# Altium PCB first_test.PcbDoc (part 1 of 5)
Units mil, origin at the board's own origin, x right, y up, seen from the top; angles counter-clockwise.
Board outline 3440.59 x 3087.6 mil, 4 copper layers (Top Layer, GND, VCC, Bottom Layer); 175 components, 91 nets, 2807 pads, 1128 vias.
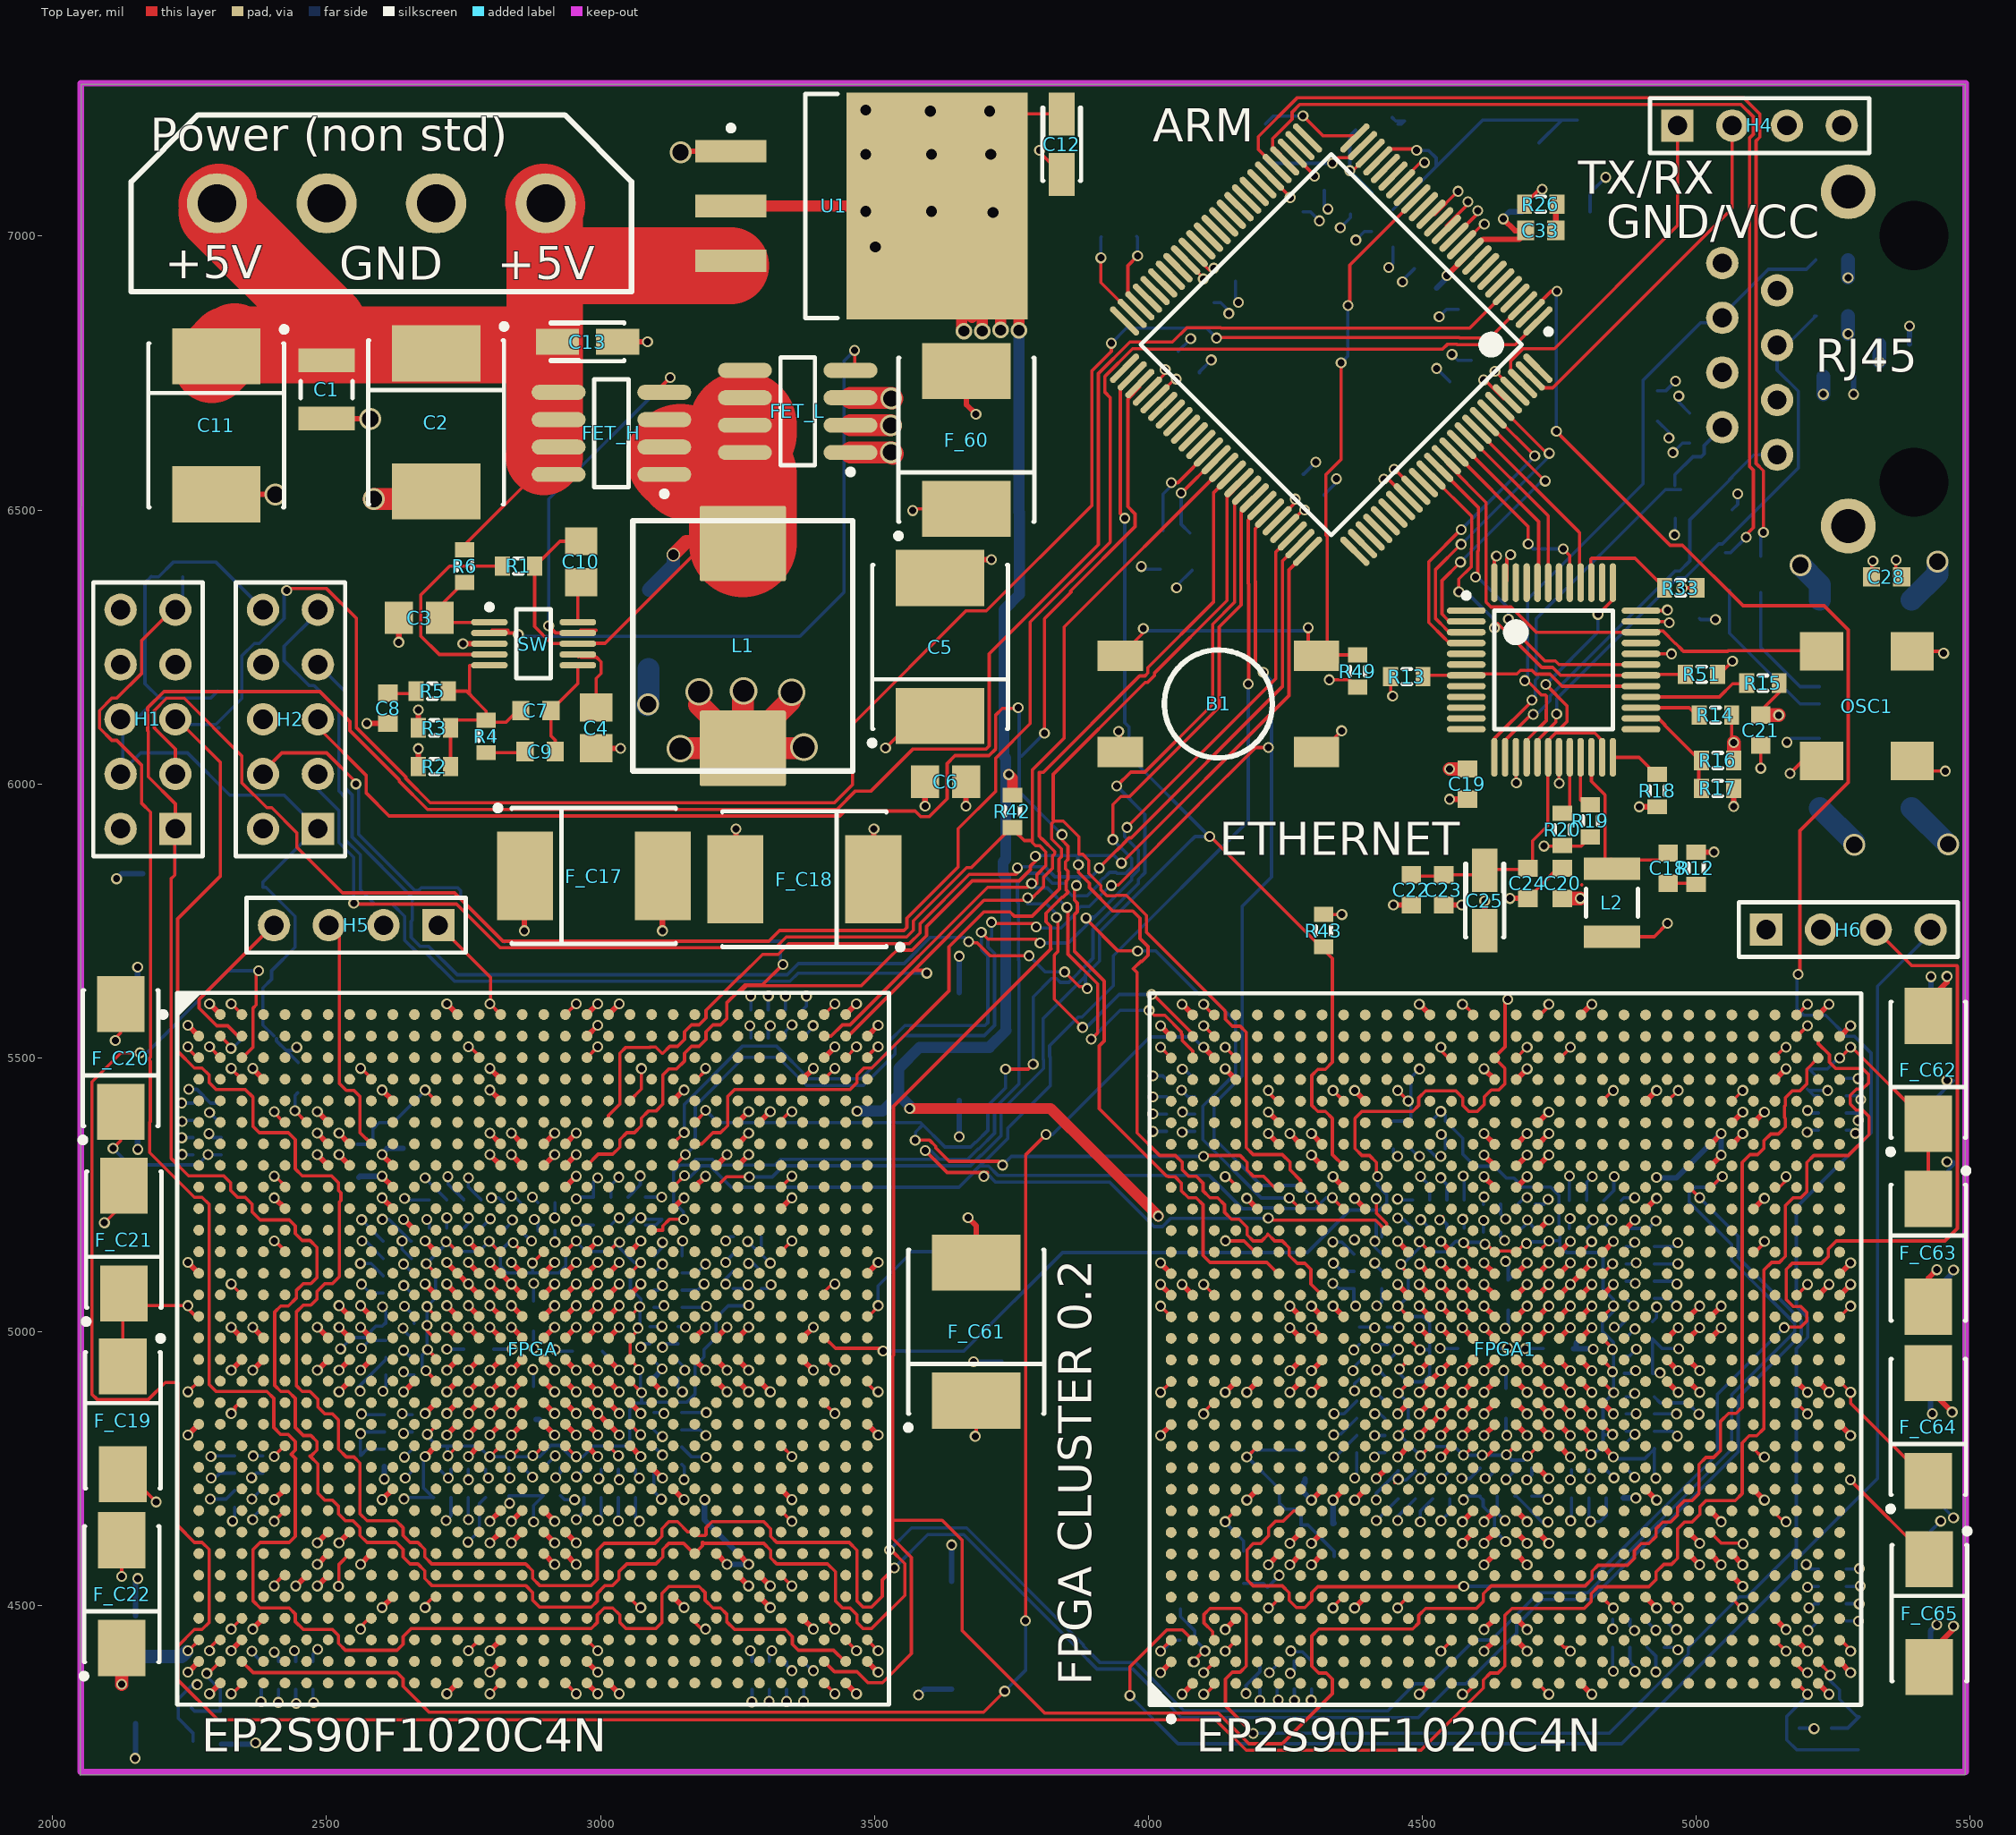
[diagram p0: Top Layer view]
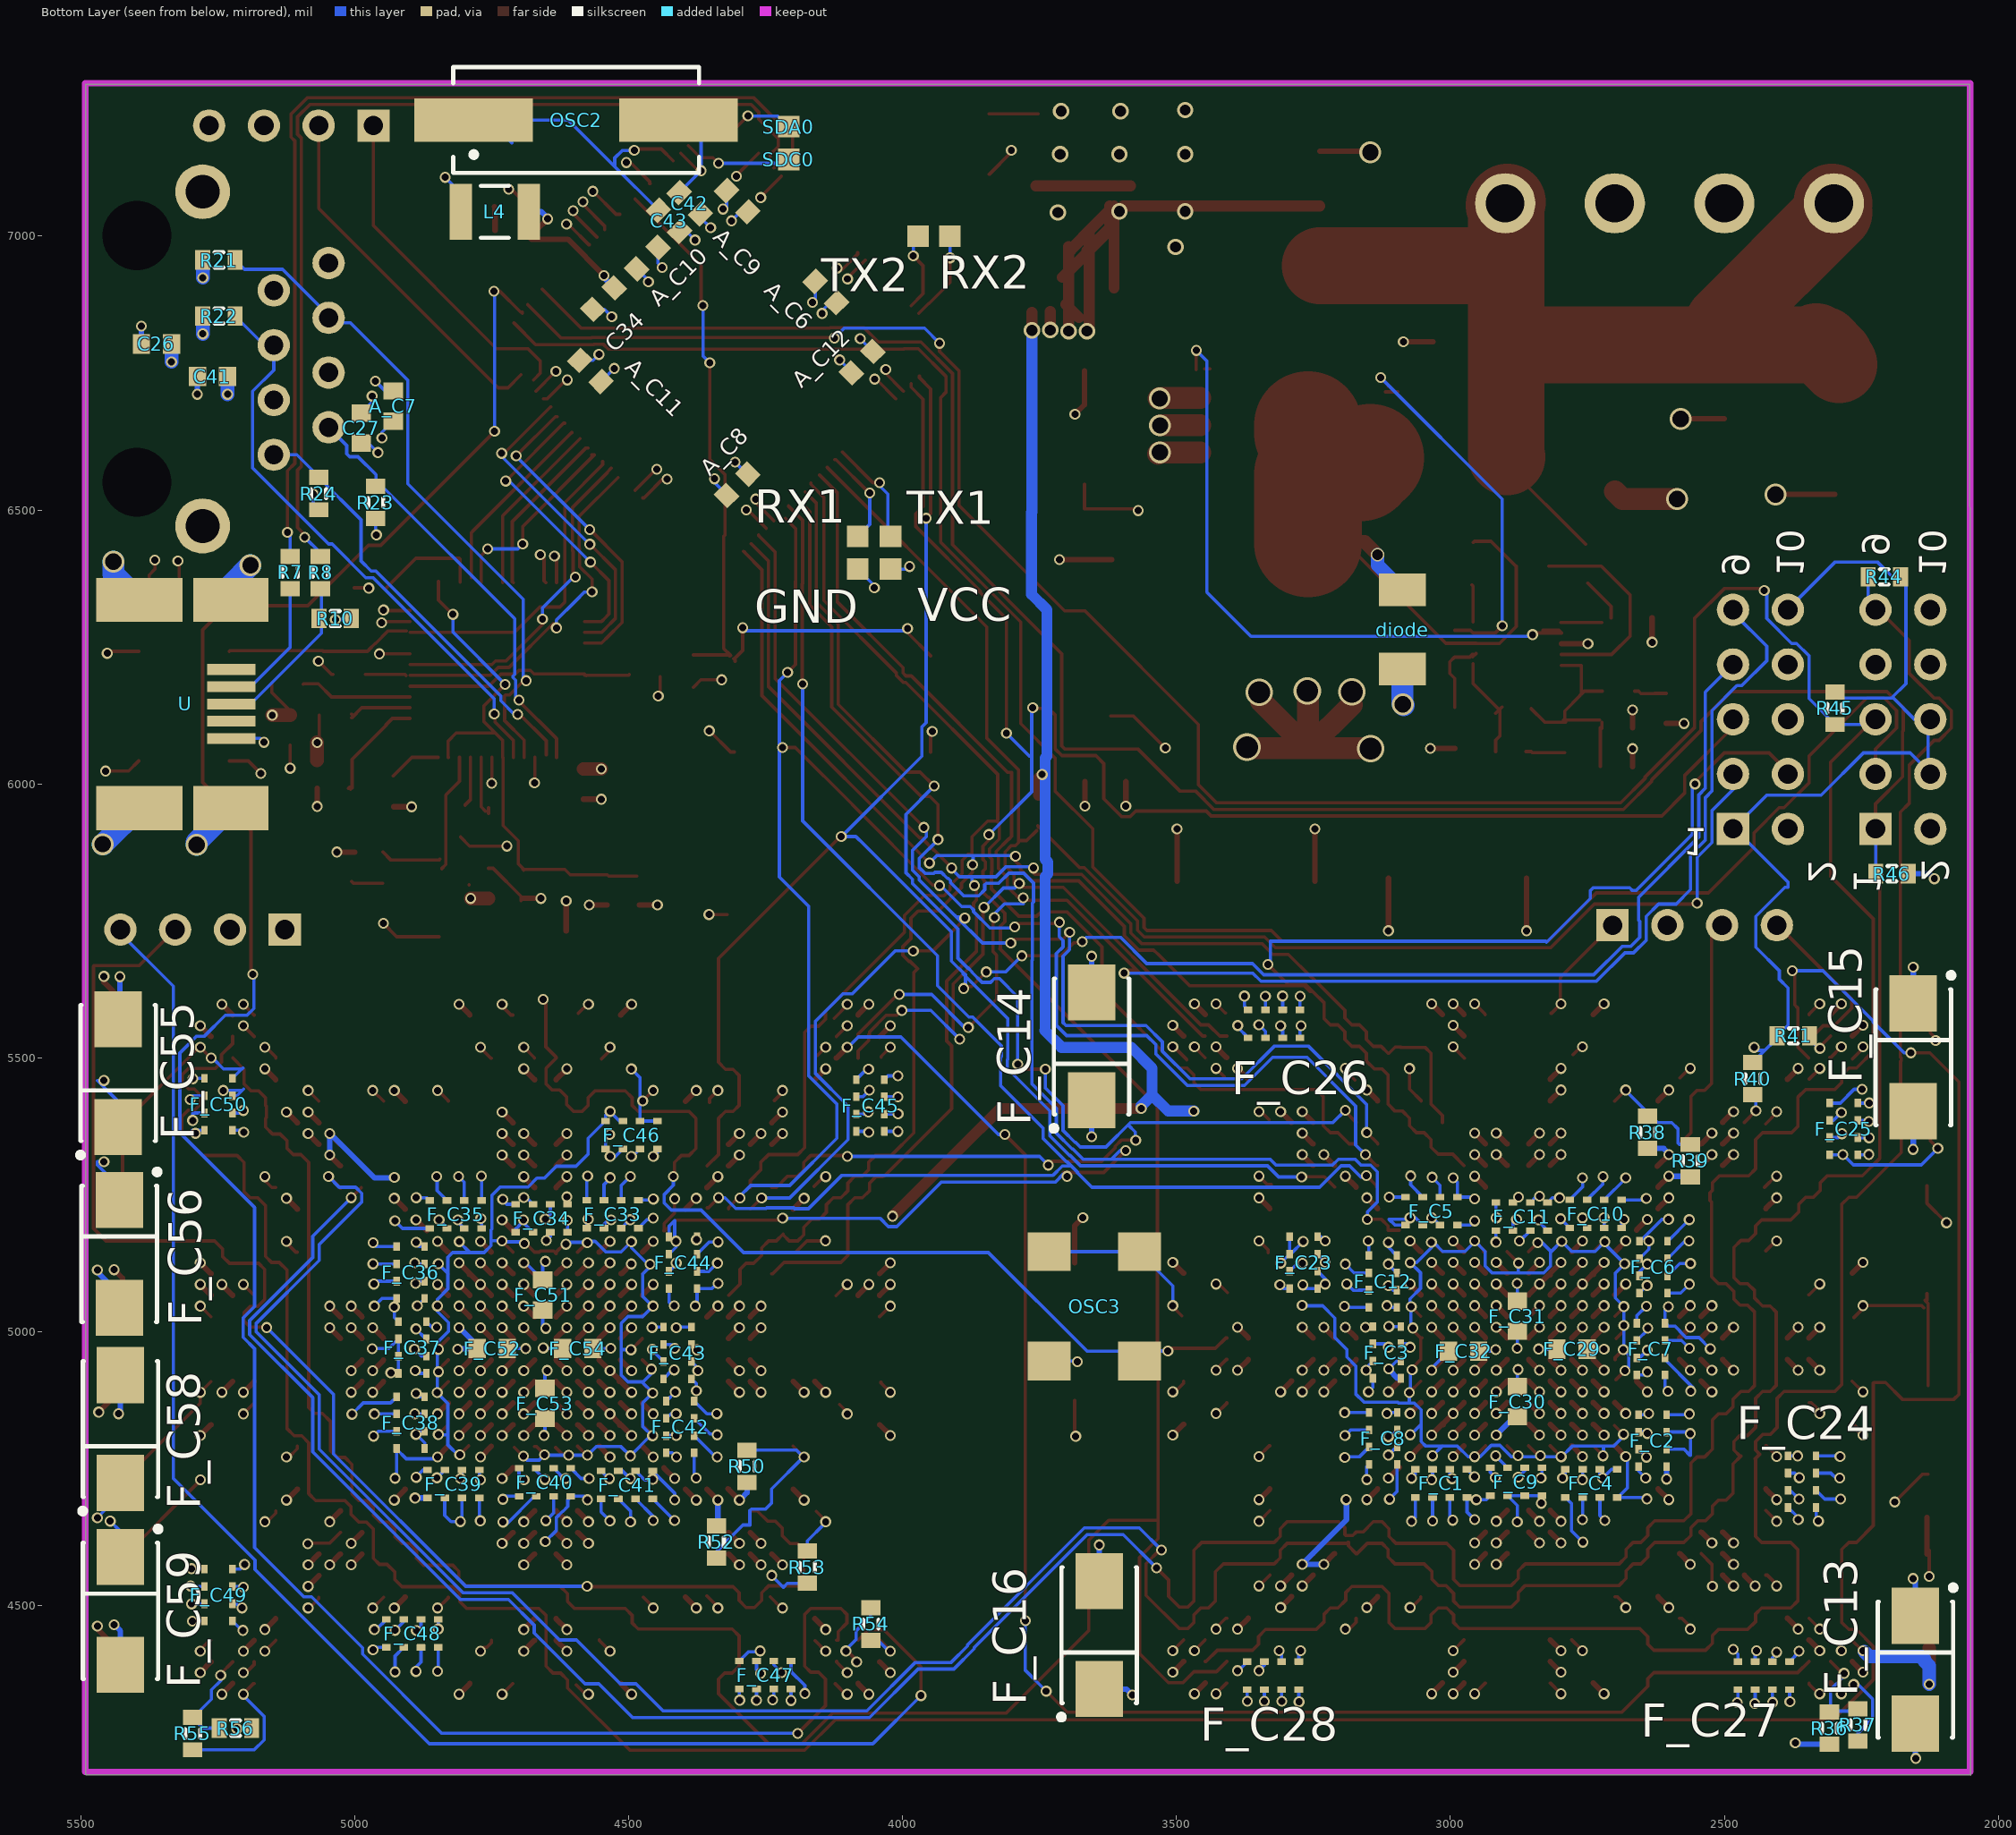
[diagram p1: Bottom Layer view, seen from below]
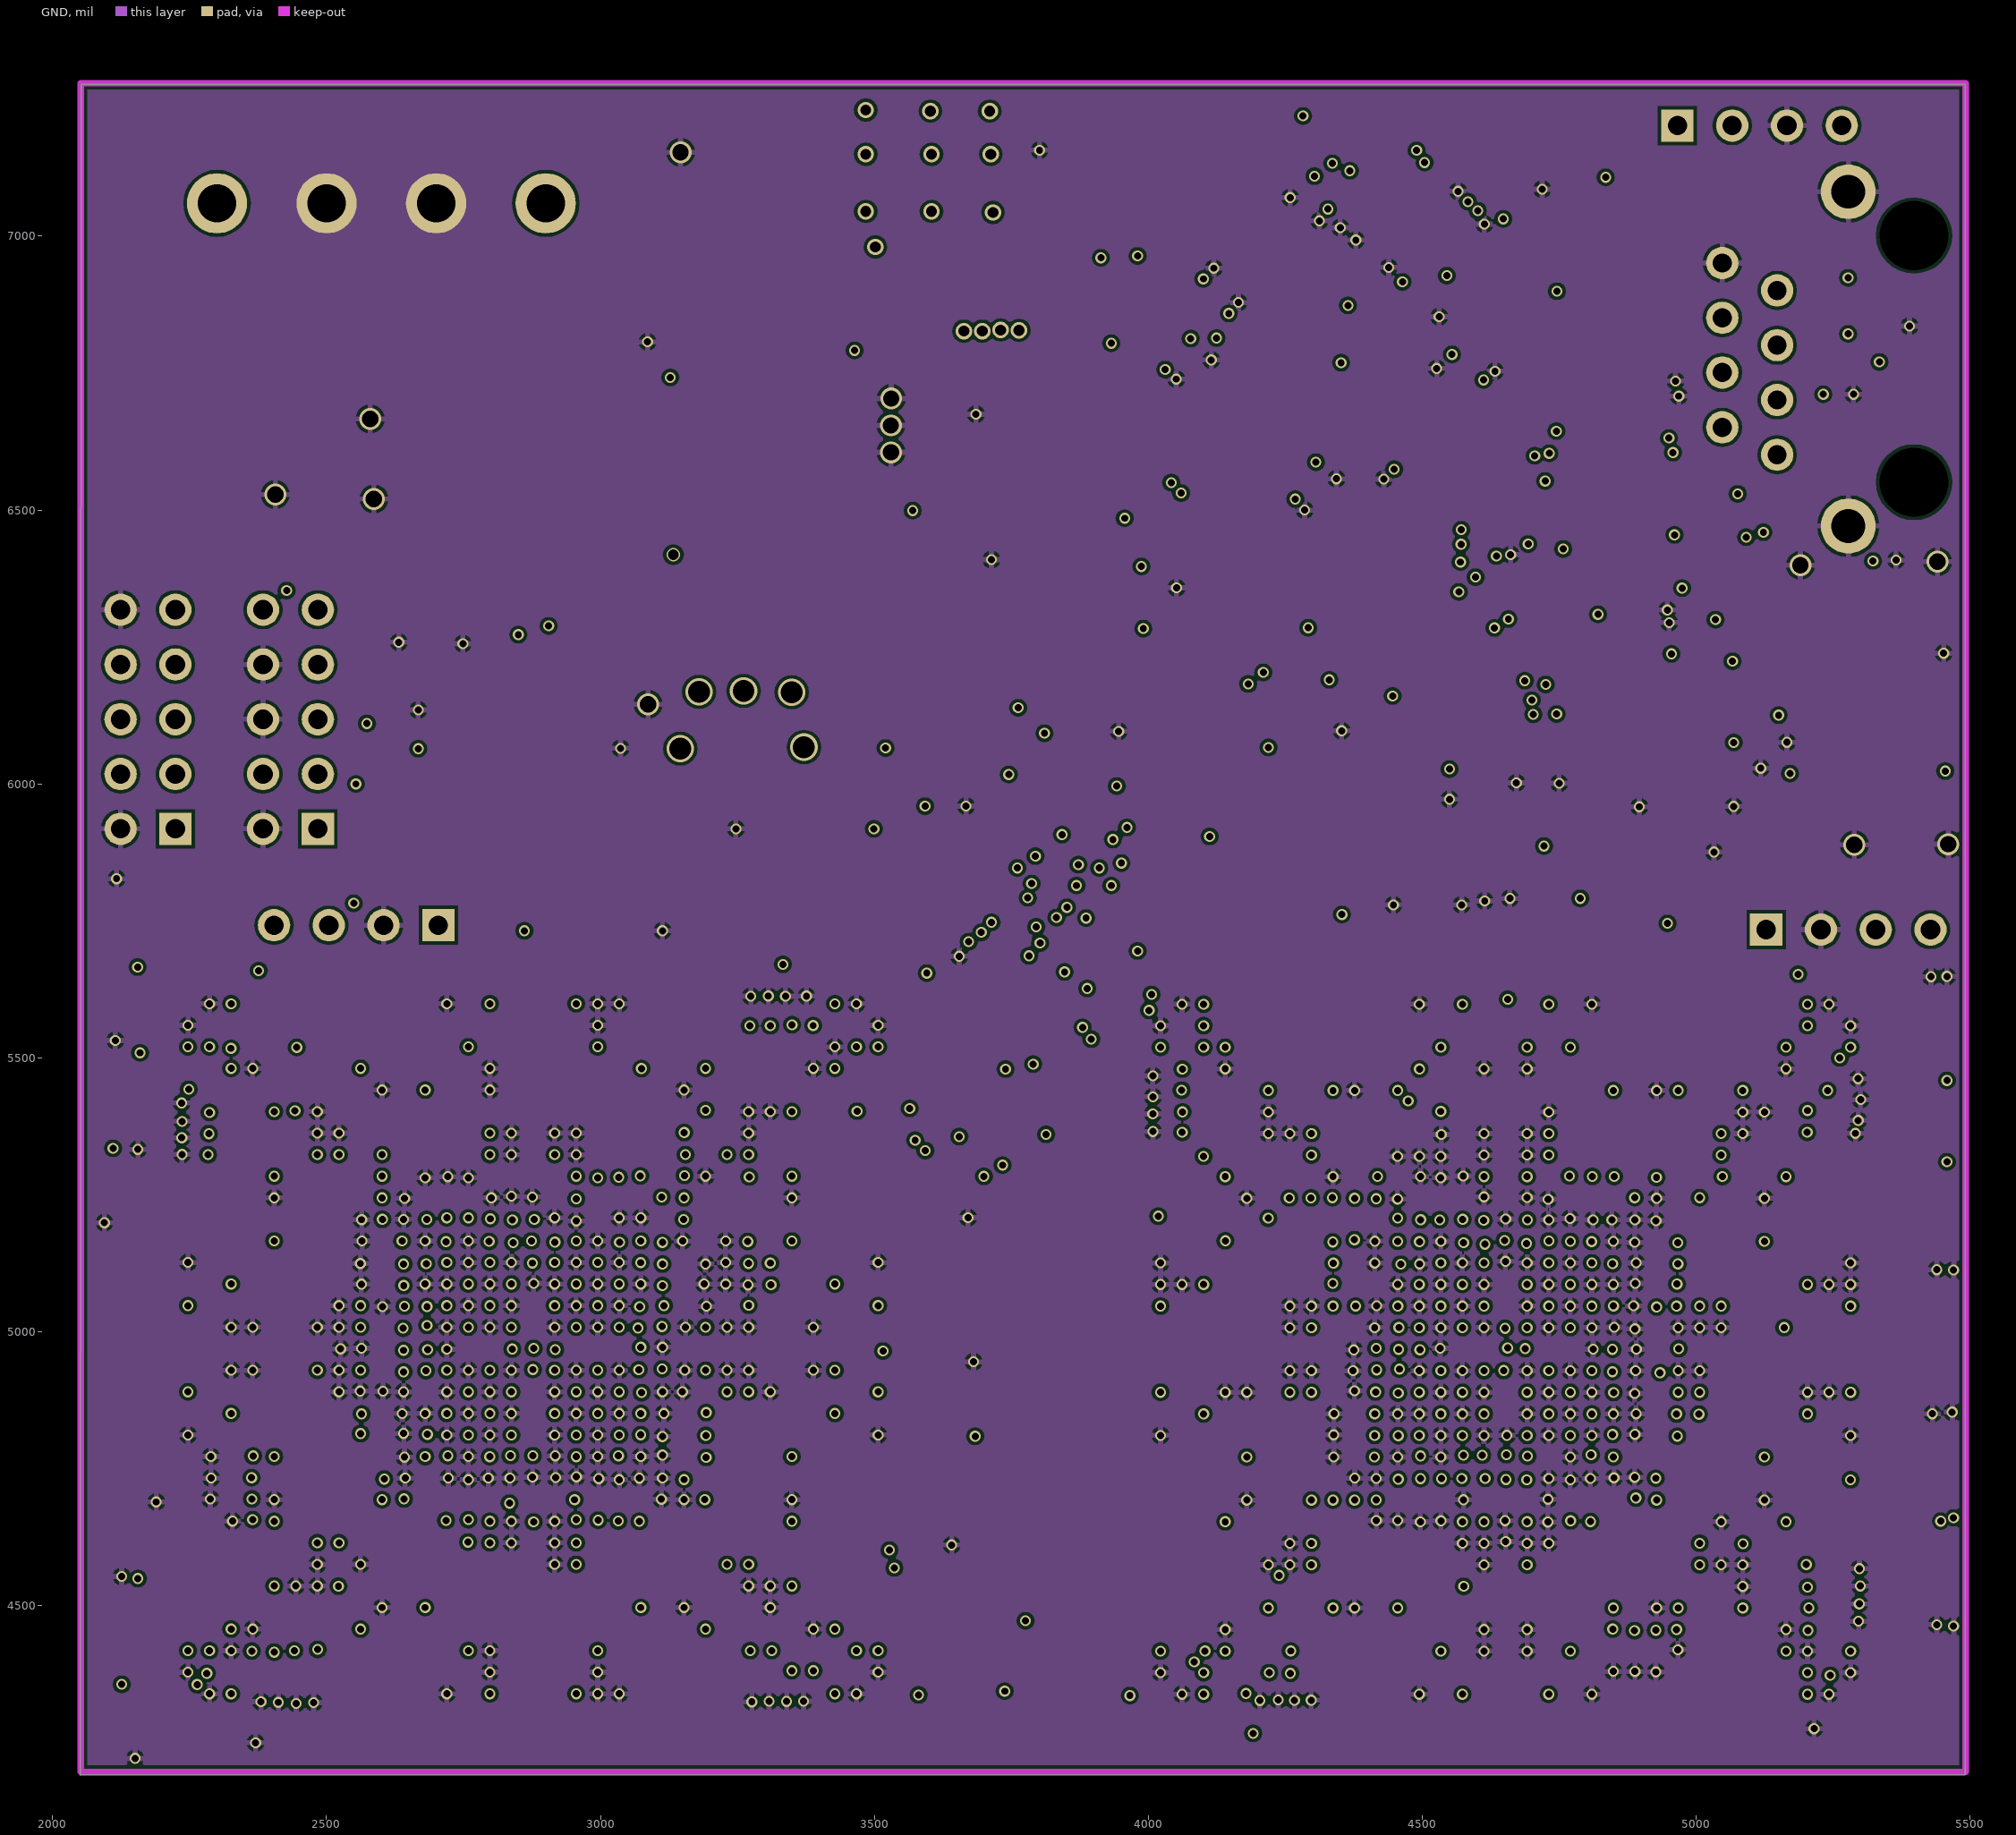
[diagram p2: GND]
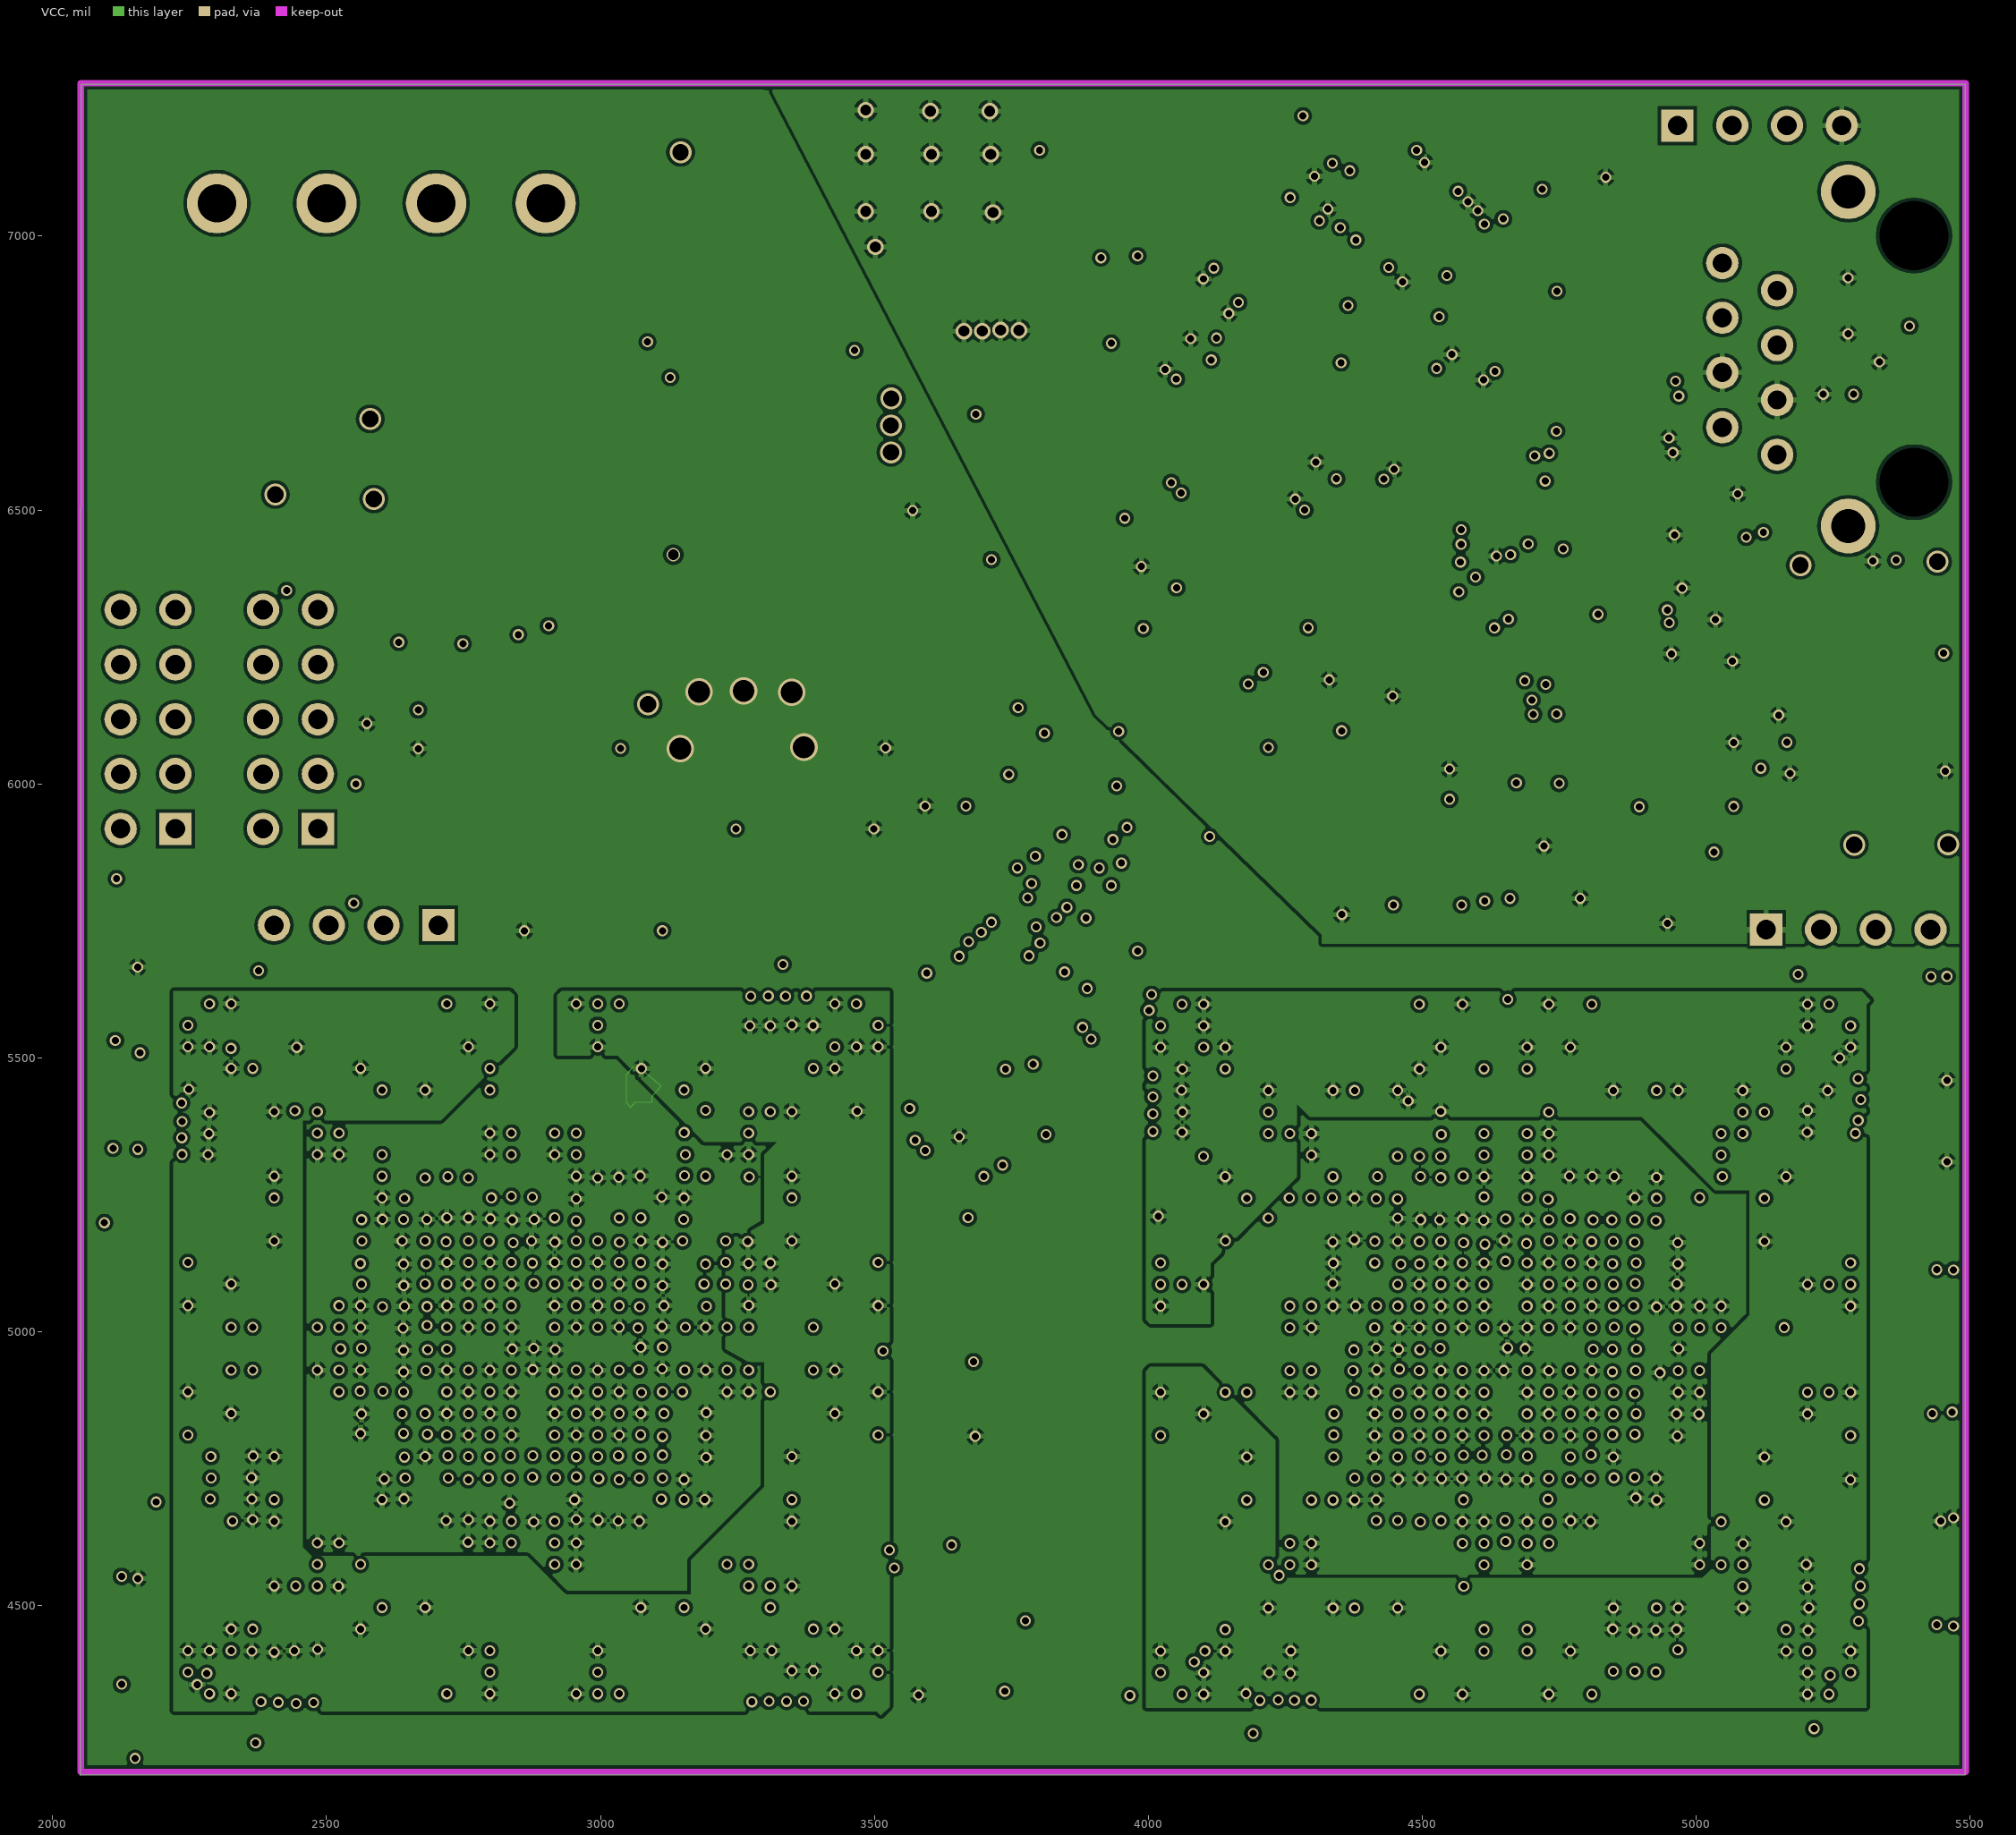
[diagram p3: VCC]

## Layer stack, top to bottom
Top Layer: signal copper 1.4
Dielectric: core 12.6, FR-4, Dk 4.8
GND: signal copper 1.4
Dielectric: prepreg 12.6, FR-4, Dk 4.8
VCC: signal copper 1.4
Dielectric: core 12.6, FR-4, Dk 4.8
Bottom Layer: signal copper 1.4

## Board outline
2051.93,7277.4 5490.51,7277.4 5490.91,7277.8 5491.3,7277.4 5491.3,4190.39 2050.91,4190.39 2050.71,4190.2

## Design rules (kind name [scope] priority, off if disabled: settings)
Clearance [All] p1: gap=6
HoleSize [All] p1: absolutevalues=TRUE maxlimit=200 minlimit=1 maxpercent=80.000 minpercent=20.000
MinimumSolderMaskSliver [All] p1: minsoldermaskwidth=0
PlaneConnect [All] p1: planeconnectstyle=Direct reliefexpansion=20 reliefentries=4 reliefconductorwidth=10 reliefairgap=10
PolygonConnect PolygonConnect_Direct [InComponent('Power') OR (ViaDiameter = 50)] p1: connectstyle=Direct reliefconductorwidth=10 reliefentries=4 polygonreliefangle="90 Angle"
PolygonConnect [All] p2: connectstyle=Relief reliefconductorwidth=10 reliefentries=4 polygonreliefangle="90 Angle"
RoutingLayers [All] p1: top layer_v5=TRUE mid layer 1_v5=FALSE mid layer 2_v5=FALSE bottom layer_v5=TRUE
RoutingVias [All] p1: holewidth=13 width=20 viastyle="Through Hole" minholewidth=13 minwidth=20 maxholewidth=208 maxwidth=200
SilkToSilkClearance [All] p1: silktosilkclearance=6.06
SilkscreenOverComponentPads [All] p1: minsilkscreentomaskgap=10
SolderMaskExpansion [All] p1: expansion=4
Width Width_VCCPD [InNet('VCCPD')] p1: maxlimit=30 minlimit=6 preferedwidth=25
Width [All] p2: maxlimit=196.85 minlimit=6 preferedwidth=10
22 further rules are at their usual default settings.

## Classes and differential pairs
component class decoupling: F_60 F_C1 F_C2 F_C3 F_C4 F_C5 F_C6 F_C7 F_C8 F_C9 F_C10 F_C11 F_C12 F_C13 F_C14 F_C15 F_C16 F_C17 F_C18 F_C19 F_C20 F_C21 F_C22 F_C23 F_C24 F_C25 F_C26 F_C27 F_C28 F_C29 F_C30 F_C31 F_C32 F_C33 F_C34 F_C35 F_C36 F_C37 F_C38 F_C39 F_C40 F_C41 F_C42 F_C43 F_C44 F_C45 F_C46 F_C47 F_C48 F_C49 F_C50 F_C51 F_C52 F_C53 F_C54 F_C55 F_C56 F_C58 F_C59 F_C61 F_C62 F_C63 F_C64 F_C65
component class arm: A_C6 A_C7 A_C8 A_C9 A_C10 A_C11 A_C12 ARM B1 C33 C34 C42 C43 GND H4 L4 OSC2 R7 R8 R10 R26 R49 RX1 RX2 SDA0 SDC0 TX1 TX2 U VCC
component class power_supply: C12 C13 L1 R1 R2 R3 R4 R5 R6 U1
component class IO: FPGA
component class configuration: H1 H2 H5 R36 R37 R38 R39 R40 R41 R42 R43 R44 R45 R46
component class ethernet: C18 C19 C20 C21 C22 C23 C24 C25 C26 C27 C28 C41 ETHERNET L2 OSC1 R12 R13 R14 R15 R16 R17 R18 R19 R20 R21 R22 R23 R24 R33 R51 RJ45
component class clk: OSC3
component class Sheet1: FPGA1 H6 R50 R52 R53 R54 R55 R56

## Components (designator, comment, footprint, x,y, rotation, side; value= is the part's Value field where it differs from the comment)
A_C6 "Cap Semi" CAPC1608L 4140,6898 r45 bottom
A_C7 "Cap Semi" CAPC1608L 4930,6690 r90 bottom
A_C8 "Cap Semi" CAPC1608L 4302,6546 r315 bottom
A_C9 "Cap Semi" CAPC1608L 4302,7064 r225 bottom
A_C10 "Cap Semi" CAPC1608L 4466,6960 r135 bottom
A_C11 "Cap Semi" CAPC1608L 4570,6754 r225 bottom
A_C12 "Cap Semi" CAPC1608L 4074,6770 r315 bottom
ARM "LPC2364FBD100" SOT407-1_N 4334,6802 r225 top
B1 "Push button" "SMD Button" 4128,6146 r90 top
C1 "10V" CAPC3225L 2500,6720 r270 top
C2 "6V" E 2700,6660 r270 top
C3 "Cap Semi" 2012[0805] 2669.29,6303.15 r180 top
C4 "Cap Semi" 2012[0805] 2992.13,6102.36 r90 top
C5 "2.5V" E 3620,6250 r90 top
C6 "Cap Semi" 2012[0805] 3629.92,6003.94 r180 top
C7 "Cap Semi" CAPC1608L 2881.89,6133.86 r0 top
C8 "Cap Semi" CAPC1608L 2612,6138 r90 top
C9 "Cap Semi" CAPC1608L 2889.76,6059.06 r0 top
C10 "Cap Semi" 2012[0805] 2964.57,6405.51 r270 top
C11 "6V" E 2298.58,6654.69 r270 top
C12 "T492A" A 3842,7168 r270 top
C13 "T492A" A 2976.38,6807.09 r0 top
C18 "Cap Semi" CAPC1608L 4948.82,5846.02 r270 top
C19 "Cap Semi" CAPC1608L 4582.68,5999.57 r270 top
C20 "Cap Semi" CAPC1608L 4755.91,5818.46 r90 top
C21 "Cap Semi" CAPC1608L 5118.11,6097.99 r270 top
C22 "Cap Semi" CAPC1608L 4480.31,5806.65 r270 top
C23 "Cap Semi" CAPC1608L 4539.37,5806.65 r270 top
C24 "Cap Semi" CAPC1608L 4692.91,5818.46 r270 top
C25 "T492A" A 4614.17,5786.97 r270 top
C26 "Cap Semi" CAPC1608L 5362.2,6803.15 r180 bottom
C27 "Cap Semi" CAPC1608L 4988.19,6649.61 r270 bottom
C28 "Cap Semi" CAPC1608L 5348,6378 r0 top
C33 "Cap Semi" CAPC1608L 4716.5,7010.5 r0 top
C34 "Cap Semi" CAPC1608L 4546,6886 r315 bottom
C41 "Cap Semi" CAPC1608L 5259.84,6744.09 r180 bottom
C42 "Cap Semi" CAPC1608L 4388.5,7060 r45 bottom
C43 "Cap Semi" CAPC1608L 4426.5,7028 r45 bottom
diode "Diode SMD" "Diode SMD" 3088,6282 r90 bottom
ETHERNET "DP83848CVV" VBH48A_N 4740,6208 r0 top
F_60 "2.5V" E 3668,6628 r90 top
F_C1 "Capacitor Array" "0612 ARRAY" 3016.89,4722.93 r0 bottom
F_C2 "Capacitor Array" "0612 ARRAY" 2630.89,4800.93 r270 bottom
F_C3 "Capacitor Array" "0612 ARRAY" 3116,4962 r270 bottom
F_C4 "Capacitor Array" "0612 ARRAY" 2742.89,4722.93 r0 bottom
F_C5 "Capacitor Array" "0612 ARRAY" 3034.67,5220.02 r180 bottom
F_C6 "Capacitor Array" "0612 ARRAY" 2629.16,5117.65 r90 bottom
F_C7 "Capacitor Array" "0612 ARRAY" 2634,4968 r90 bottom
F_C8 "Capacitor Array" "0612 ARRAY" 3122.89,4804.93 r90 bottom
F_C9 "Capacitor Array" "0612 ARRAY" 2880,4726 r0 bottom
F_C10 "Capacitor Array" "0612 ARRAY" 2734.89,5214.93 r0 bottom
F_C11 "Capacitor Array" "0612 ARRAY" 2870,5210 r0 bottom
F_C12 "Capacitor Array" "0612 ARRAY" 3123.5,5091.5 r270 bottom
F_C13 "2.5V" C 2151.06,4382.83 r270 bottom
F_C14 "2.5V" C 3655,5520.63 r90 bottom
F_C15 "2.5V" C 2155,5500.94 r270 bottom
F_C16 "2.5V" C 3641.22,4445.83 r90 bottom
F_C17 "2.5V" E 2988,5832 r0 top
F_C18 "2.5V" E 3372,5826 r180 top
F_C19 "6V" C 2128,4838 r270 top
F_C20 "6V" C 2124.03,5499.45 r90 top
F_C21 "6V" C 2130,5168 r90 top
F_C22 "6V" C 2126.06,4520.66 r90 top
F_C23 "Capacitor Array" "0612 Array" 3268,5126 r90 bottom
F_C24 "Capacitor Array" "0612 Array" 2358,4726 r90 bottom
F_C25 "Capacitor Array" "0612 Array" 2282,5370 r90 bottom
F_C26 "Capacitor Array" "0612 Array" 3322,5562 r0 bottom
F_C27 "Capacitor Array" "0612 Array" 2428,4372 r180 bottom
F_C28 "Capacitor Array" "0612 Array" 3324,4372 r180 bottom
F_C29 "Cap Semi" CAPC1608L 2778,4968 r180 bottom
F_C30 "Cap Semi" CAPC1608L 2878,4872 r270 bottom
F_C31 "Cap Semi" CAPC1608L 2878,5028 r90 bottom
F_C32 "Cap Semi" CAPC1608L 2976,4964 r0 bottom
F_C33 "Capacitor Array" "0612 ARRAY" 4529.5,5214.5 r0 bottom
F_C34 "Capacitor Array" "0612 ARRAY" 4659,5207 r0 bottom
F_C35 "Capacitor Array" "0612 ARRAY" 4816.07,5213.89 r180 bottom
F_C36 "Capacitor Array" "0612 ARRAY" 4898.07,5107.89 r90 bottom
F_C37 "Capacitor Array" "0612 ARRAY" 4895,4971 r90 bottom
F_C38 "Capacitor Array" "0612 ARRAY" 4898.07,4833.89 r90 bottom
F_C39 "Capacitor Array" "0612 ARRAY" 4820.07,4721.89 r0 bottom
F_C40 "Capacitor Array" "0612 ARRAY" 4653,4725 r180 bottom
F_C41 "Capacitor Array" "0612 ARRAY" 4503.35,4720.16 r180 bottom
F_C42 "Capacitor Array" "0612 ARRAY" 4406.07,4825.89 r90 bottom
F_C43 "Capacitor Array" "0612 ARRAY" 4411,4961 r90 bottom
F_C44 "Capacitor Array" "0612 ARRAY" 4400.98,5125.67 r270 bottom
F_C45 "Capacitor Array" "0612 Array" 4059,5413 r90 bottom
F_C46 "Capacitor Array" "0612 Array" 4495,5359 r180 bottom
F_C47 "Capacitor Array" "0612 Array" 4251,4373 r180 bottom
F_C48 "Capacitor Array" "0612 Array" 4895,4449 r180 bottom
F_C49 "Capacitor Array" "0612 Array" 5249,4519 r270 bottom
F_C50 "Capacitor Array" "0612 Array" 5249,5415 r270 bottom
F_C51 "Cap Semi" CAPC1608L 4657,5067 r90 bottom
F_C52 "Cap Semi" CAPC1608L 4749,4969 r0 bottom
F_C53 "Cap Semi" CAPC1608L 4653,4869 r270 bottom
F_C54 "Cap Semi" CAPC1608L 4593,4969 r180 bottom
F_C55 "2.5V" C 5432,5472 r90 bottom
F_C56 "2.5V" C 5430,5142 r270 bottom
F_C58 "2.5V" C 5428,4822 r90 bottom
F_C59 "2.5V" C 5428,4490 r270 bottom
F_C61 "2.5V" E 3686,5000 r90 top
F_C62 "6V" C 5424,5478 r90 top
F_C63 "6V" C 5424,5144 r270 top
F_C64 "6V" C 5424,4826 r90 top
F_C65 "6V" C 5426,4486 r270 top
FET_H "Si4156DY" SO-8C_M 3020,6640 r180 top
FET_L "Si4156DY" SO-8C_M 3360,6680 r180 top
FPGA "EP2S90F1020C4N" FBGA1020 2876.89,4968.7 r0 top
FPGA1 "EP2S90F1020C4N" FBGA1020 4652,4968 r90 top
GND "Probe" "Probe pad" 4082,6392 r270 bottom
H1 "Header 5X2" HDR2X5 2224,5918 r90 top
H2 "Header 5X2" HDR2X5 2484,5918 r90 top
H4 "Header 4" HDR1X4 4966,7202 r0 top
H5 "Header 4" HDR1X4 2704,5742 r180 top
H6 "Header 4" HDR1X4 5128,5734 r0 top
L1 "IHLP4040DZER1R5M01" IHLP4040DZER1R5M01 3259.84,6251.97 r270 top
L2 "NLV32T-100J-PF" INDC3225X22N 4846.46,5783.03 r90 top
L4 "NLV32T-100J-PF" INDC3225X22N 4744.5,7044.5 r180 bottom
OSC1 "Oscillator 4 pin" "SMD Crystal 7x5 mm" 5312,6142 r90 top
OSC2 "Oscillator" HC49/4H_SMX 4596,7212 r180 bottom
OSC3 "Oscillator 4 pin" "SMD Crystal 7x5 mm" 3650,5046 r270 bottom
Power "ATX_CONNECTOR" "MOLEX 8981" 2600,7060 r180 top
R1 "Res3" RESC1608L 2850.39,6397.64 r0 top
R2 "Res3" RESC1608L 2696.85,6031.5 r180 top
R3 "Res3" RESC1608L 2696.85,6102.36 r0 top
R4 "Res3" RESC1608L 2791.34,6086.61 r90 top
R5 "Res3" RESC1608L 2692.91,6169.29 r180 top
R6 "Res3" RESC1608L 2751.97,6397.64 r90 top
R7 "Res3" RESC1608L 5118.11,6385.83 r270 bottom
R8 "Res3" RESC1608L 5062.99,6385.83 r270 bottom
R10 "Res3" RESC1608L 5036,6302 r180 bottom
R12 "Res3" RESC1608L 5000,5846.02 r270 top
R13 "Res3" RESC1608L 4472,6196 r180 top
R14 "Res3" RESC1608L 5035.43,6125.55 r0 top
R15 "Res3" RESC1608L 5122,6184 r0 top
R16 "Res3" RESC1608L 5039.37,6042.87 r0 top
R17 "Res3" RESC1608L 5039.37,5991.69 r180 top
R18 "Res3" RESC1608L 4929.13,5987.76 r90 top
R19 "Res3" RESC1608L 4807.09,5932.64 r90 top
R20 "Res3" RESC1608L 4755.91,5916.89 r90 top
R21 "Res3" RESC1608L 5248.03,6956.69 r180 bottom
R22 "Res3" RESC1608L 5248.03,6854.33 r0 bottom
R23 "Res3" RESC1608L 4962,6514 r90 bottom
R24 "Res3" RESC1608L 5066,6530 r270 bottom
R26 "Res3" RESC1608L 4716.5,7058.5 r0 top
R33 "" RESC1608L 4972,6358 r180 top
R36 "DNP?" RESC1608L 2308,4276 r270 bottom
R37 "DNP?" RESC1608L 2256,4282 r90 bottom
R38 "DNP" RESC1608L 2640,5364 r270 bottom
R39 "DNP" RESC1608L 2562,5312 r270 bottom
R40 "DNP" RESC1608L 2448,5462 r270 bottom
R41 "DNP" RESC1608L 2374,5540 r180 bottom
R42 "" RESC1608L 3752,5950 r90 top
R43 "" RESC1608L 4320,5732 r90 top
R44 "Res3" RESC1608L 2208,6378 r0 bottom
R45 "Res3" RESC1608L 2298,6138 r270 bottom
R46 "Res3" RESC1608L 2194,5836 r180 bottom
R49 "Res3" RESC1608L 4382,6206 r270 top
R50 "DNP" RESC1608L 4284,4754 r270 bottom
R51 "Res3" RESC1608L 5010,6200 r0 top
R52 "DNP" RESC1608L 4340,4616 r90 bottom
R53 "DNP" RESC1608L 4174,4570 r270 bottom
R54 "DNP" RESC1608L 4058,4466 r90 bottom
R55 "R55" RESC1608L 5296,4266 r90 bottom
R56 "DNP?" RESC1608L 5218,4276 r180 bottom
RJ45 "RJ45 Integrated Magnetics" RJ45 5098,6776 r90 top
RX1 "Probe" "PROBE PAD" 4082,6452 r180 bottom
RX2 "Probe" "Probe pad" 3914,7000 r270 bottom
SDA0 "Probe" "Probe pad" 4208,7200 r270 bottom
SDC0 "Probe" "Probe pad" 4208,7140 r270 bottom
SW "LM3743MM-300" MUB10A_N 2877.95,6255.91 r0 top
TX1 "Probe" "PROBE PAD" 4022,6452 r180 bottom
TX2 "Probe" "Probe pad" 3972,7000 r270 bottom
U "Mini USB" "Mini USB B" 5310,6146 r180 bottom
U1 "LM1086IS-3.3" TS3B_N 3476.38,7055.12 r0 top
VCC "Probe" "Probe pad" 4022,6392 r270 bottom

## Footprints (in the part's own frame and the unit in brackets; to place one, negate y for a bottom-side part, rotate by r counter-clockwise, add the part's x,y. Pads: shape width x height; smd on the part's side, far side on the other; paste and mask are expansions set on the pad)
"0612 ARRAY" [mm] "0612 Capacitor Array"
  rrect5% 0.4x0.3 smd: 1(-1.2,0.65) 2(-0.4,0.65) 3(0.4,0.65) 4(1.2,0.65) 5(-1.2,-0.65) 6(-0.4,-0.65) 7(0.4,-0.65) 8(1.2,-0.65)
  body extent -1.5,-0.9 1.5,0.9, height 0.9
"0612 Array" [mm] "0612 Capacitor Array"
  rrect5% 0.4x0.3 smd: 1(-1.2,0.65) 2(-0.4,0.65) 3(0.4,0.65) 4(1.2,0.65) 5(-1.2,-0.65) 6(-0.4,-0.65) 7(0.4,-0.65) 8(1.2,-0.65)
  body extent -1.5,-0.9 1.5,0.9, height 0.9
2012[0805] [mm] "Chip Resistor; Body 2.0 x 1.3 mm (LxW typ)"
  rect 1.3x1.5 smd: 1(-0.95,0) 2(0.95,0)
A [mm] "Capacitor, SM Tantalum; Body 3.2 x 1.6 mm (LxW typ)"
  rect 2x1.2 smd: 1(-1.4,0) 2(1.4,0)
  silkscreen extent -1.7,-0.9 1.7,0.9, body extent -2.5,-0.7 2.5,0.7, height 1.8
C [mm] "Capacitor, SM Tantalum; Body 6.0 x 3.2 mm (LxW typ)"
  rect 2.6x2.2 smd: 1(-2.5,0) 2(2.5,0)
  silkscreen extent -3.92,-1.75 3.15,1.87, body extent -3.9,-1.2 3.9,1.2, height 2.8
CAPC1608L [mm] "Chip Capacitor, Body 1.6x0.8mm, IPC High Density"
  rect 0.8x0.9 smd: 1(-0.7,0) 2(0.7,0)
  body extent -0.87,-0.48 0.87,0.47, height 1.3
CAPC3225L [mm] "Chip Capacitor, Body 3.2x2.5mm, IPC High Density"
  rect 1.1x2.6 smd: 1(-1.35,0) 2(1.35,0)
  silkscreen extent -0.4,-1.2 0.4,1.2, body extent -1.7,-1.35 1.7,1.35, height 1.5
"Diode SMD" [mm] "DO-214AA"
  rect 1.52x2.18 smd: 1(-1.84,0) 2(1.84,0)
E [mm] "Capacitor, SM Tantalum; Body 7.3 x 6.0 mm (LxW typ)"
  rect 2.6x4.1 smd: 1(-3.2,0) 2(3.2,0)
  silkscreen extent -4.57,-3.15 3.8,3.27, body extent -4.6,-2.15 4.6,2.15, height 3.8
FBGA1020 [mm] "BGA, 1020-Leads, Body 33x33mm, Pitch 1mm"
  round 0.5 smd: A2(-14.5,15.5) A3(-13.5,15.5) A4(-12.5,15.5) A5(-11.5,15.5) A6(-10.5,15.5) A7(-9.5,15.5) A8(-8.5,15.5) A9(-7.5,15.5) A10(-6.5,15.5) A11(-5.5,15.5) A12(-4.5,15.5) A13(-3.5,15.5) A14(-2.5,15.5) A15(-1.5,15.5) A16(-0.5,15.5) A17(0.5,15.5) A18(1.5,15.5) A19(2.5,15.5) A20(3.5,15.5) A21(4.5,15.5) A22(5.5,15.5) A23(6.5,15.5) A24(7.5,15.5) A25(8.5,15.5) A26(9.5,15.5) A27(10.5,15.5) A28(11.5,15.5) A29(12.5,15.5) A30(13.5,15.5) A31(14.5,15.5) AA1(-15.5,-4.5) AA2(-14.5,-4.5) AA3(-13.5,-4.5) AA4(-12.5,-4.5) AA5(-11.5,-4.5) AA6(-10.5,-4.5) AA7(-9.5,-4.5) AA8(-8.5,-4.5) AA9(-7.5,-4.5) AA10(-6.5,-4.5) AA11(-5.5,-4.5) AA12(-4.5,-4.5) AA13(-3.5,-4.5) AA14(-2.5,-4.5) AA15(-1.5,-4.5) AA16(-0.5,-4.5) AA17(0.5,-4.5) AA18(1.5,-4.5) AA19(2.5,-4.5) AA20(3.5,-4.5) AA21(4.5,-4.5) AA22(5.5,-4.5) AA23(6.5,-4.5) AA24(7.5,-4.5) AA25(8.5,-4.5) AA26(9.5,-4.5) AA27(10.5,-4.5) AA28(11.5,-4.5) AA29(12.5,-4.5) AA30(13.5,-4.5) AA31(14.5,-4.5) AA32(15.5,-4.5) AB1(-15.5,-5.5) AB2(-14.5,-5.5) AB3(-13.5,-5.5) AB4(-12.5,-5.5) AB5(-11.5,-5.5) AB6(-10.5,-5.5) AB7(-9.5,-5.5) AB8(-8.5,-5.5) AB9(-7.5,-5.5) AB10(-6.5,-5.5) AB11(-5.5,-5.5) AB12(-4.5,-5.5) AB13(-3.5,-5.5) AB14(-2.5,-5.5) AB15(-1.5,-5.5) AB16(-0.5,-5.5) AB17(0.5,-5.5) AB18(1.5,-5.5) AB19(2.5,-5.5) AB20(3.5,-5.5) AB21(4.5,-5.5) AB22(5.5,-5.5) AB23(6.5,-5.5) AB24(7.5,-5.5) AB25(8.5,-5.5) AB26(9.5,-5.5) AB27(10.5,-5.5) AB28(11.5,-5.5) AB29(12.5,-5.5) AB30(13.5,-5.5) AB31(14.5,-5.5) AB32(15.5,-5.5) AC1(-15.5,-6.5) AC2(-14.5,-6.5) AC3(-13.5,-6.5) AC4(-12.5,-6.5) AC5(-11.5,-6.5) AC6(-10.5,-6.5) AC7(-9.5,-6.5) AC8(-8.5,-6.5) AC9(-7.5,-6.5) AC10(-6.5,-6.5) AC11(-5.5,-6.5) AC12(-4.5,-6.5) AC13(-3.5,-6.5) AC14(-2.5,-6.5) AC15(-1.5,-6.5) AC16(-0.5,-6.5) AC17(0.5,-6.5) AC18(1.5,-6.5) AC19(2.5,-6.5) AC20(3.5,-6.5) AC21(4.5,-6.5) AC22(5.5,-6.5) AC23(6.5,-6.5) AC24(7.5,-6.5) AC25(8.5,-6.5) AC26(9.5,-6.5) AC27(10.5,-6.5) AC28(11.5,-6.5) AC29(12.5,-6.5) AC30(13.5,-6.5) AC31(14.5,-6.5) AC32(15.5,-6.5) AD1(-15.5,-7.5) AD2(-14.5,-7.5) AD3(-13.5,-7.5) AD4(-12.5,-7.5) AD5(-11.5,-7.5) AD6(-10.5,-7.5) AD7(-9.5,-7.5) AD8(-8.5,-7.5) AD9(-7.5,-7.5) AD10(-6.5,-7.5) AD11(-5.5,-7.5) AD12(-4.5,-7.5) AD13(-3.5,-7.5) AD14(-2.5,-7.5) AD15(-1.5,-7.5) AD16(-0.5,-7.5) AD17(0.5,-7.5) AD18(1.5,-7.5) AD19(2.5,-7.5) AD20(3.5,-7.5) AD21(4.5,-7.5) AD22(5.5,-7.5) AD23(6.5,-7.5) AD24(7.5,-7.5) AD25(8.5,-7.5) AD26(9.5,-7.5) AD27(10.5,-7.5) AD28(11.5,-7.5) AD29(12.5,-7.5) AD30(13.5,-7.5) AD31(14.5,-7.5) AD32(15.5,-7.5) AE1(-15.5,-8.5) AE2(-14.5,-8.5) AE3(-13.5,-8.5) AE4(-12.5,-8.5) AE5(-11.5,-8.5) AE6(-10.5,-8.5) AE7(-9.5,-8.5) AE8(-8.5,-8.5) AE9(-7.5,-8.5) AE10(-6.5,-8.5) AE11(-5.5,-8.5) AE12(-4.5,-8.5) AE13(-3.5,-8.5) AE14(-2.5,-8.5) AE15(-1.5,-8.5) AE16(-0.5,-8.5) AE17(0.5,-8.5) AE18(1.5,-8.5) AE19(2.5,-8.5) AE20(3.5,-8.5) AE21(4.5,-8.5) AE22(5.5,-8.5) AE23(6.5,-8.5) AE24(7.5,-8.5) AE25(8.5,-8.5) AE26(9.5,-8.5) AE27(10.5,-8.5) AE28(11.5,-8.5) AE29(12.5,-8.5) AE30(13.5,-8.5) AE31(14.5,-8.5) AE32(15.5,-8.5) AF1(-15.5,-9.5) AF2(-14.5,-9.5) AF3(-13.5,-9.5) AF4(-12.5,-9.5) AF5(-11.5,-9.5) AF6(-10.5,-9.5) AF7(-9.5,-9.5) AF8(-8.5,-9.5) AF9(-7.5,-9.5) AF10(-6.5,-9.5) AF11(-5.5,-9.5) AF12(-4.5,-9.5) AF13(-3.5,-9.5) AF14(-2.5,-9.5) AF15(-1.5,-9.5) AF16(-0.5,-9.5) AF17(0.5,-9.5) AF18(1.5,-9.5) AF19(2.5,-9.5) AF20(3.5,-9.5) AF21(4.5,-9.5) AF22(5.5,-9.5) AF23(6.5,-9.5) AF24(7.5,-9.5) AF25(8.5,-9.5) AF26(9.5,-9.5) AF27(10.5,-9.5) AF28(11.5,-9.5) AF29(12.5,-9.5) AF30(13.5,-9.5) AF31(14.5,-9.5) AF32(15.5,-9.5) AG1(-15.5,-10.5) AG2(-14.5,-10.5) AG3(-13.5,-10.5) AG4(-12.5,-10.5) AG5(-11.5,-10.5) AG6(-10.5,-10.5) AG7(-9.5,-10.5) AG8(-8.5,-10.5) AG9(-7.5,-10.5) AG10(-6.5,-10.5) AG11(-5.5,-10.5) AG12(-4.5,-10.5) AG13(-3.5,-10.5) AG14(-2.5,-10.5) AG15(-1.5,-10.5) AG16(-0.5,-10.5) AG17(0.5,-10.5) AG18(1.5,-10.5) AG19(2.5,-10.5) AG20(3.5,-10.5) AG21(4.5,-10.5) AG22(5.5,-10.5) AG23(6.5,-10.5) AG24(7.5,-10.5) AG25(8.5,-10.5) AG26(9.5,-10.5) AG27(10.5,-10.5) AG28(11.5,-10.5) AG29(12.5,-10.5) AG30(13.5,-10.5) AG31(14.5,-10.5) AG32(15.5,-10.5) AH1(-15.5,-11.5) AH2(-14.5,-11.5) AH3(-13.5,-11.5) AH4(-12.5,-11.5) AH5(-11.5,-11.5) AH6(-10.5,-11.5) AH7(-9.5,-11.5) AH8(-8.5,-11.5) AH9(-7.5,-11.5) AH10(-6.5,-11.5) AH11(-5.5,-11.5) AH12(-4.5,-11.5) AH13(-3.5,-11.5) AH14(-2.5,-11.5) AH15(-1.5,-11.5) AH16(-0.5,-11.5) AH17(0.5,-11.5) AH18(1.5,-11.5) AH19(2.5,-11.5) AH20(3.5,-11.5) AH21(4.5,-11.5) AH22(5.5,-11.5) AH23(6.5,-11.5) AH24(7.5,-11.5) AH25(8.5,-11.5) AH26(9.5,-11.5) AH27(10.5,-11.5) AH28(11.5,-11.5) AH29(12.5,-11.5) AH30(13.5,-11.5) AH31(14.5,-11.5) AH32(15.5,-11.5) AJ1(-15.5,-12.5) AJ2(-14.5,-12.5) AJ3(-13.5,-12.5) AJ4(-12.5,-12.5) AJ5(-11.5,-12.5) AJ6(-10.5,-12.5) AJ7(-9.5,-12.5) AJ8(-8.5,-12.5) AJ9(-7.5,-12.5) AJ10(-6.5,-12.5) AJ11(-5.5,-12.5) AJ12(-4.5,-12.5) AJ13(-3.5,-12.5) AJ14(-2.5,-12.5) AJ15(-1.5,-12.5) AJ16(-0.5,-12.5) AJ17(0.5,-12.5) AJ18(1.5,-12.5) AJ19(2.5,-12.5) AJ20(3.5,-12.5) AJ21(4.5,-12.5) AJ22(5.5,-12.5) AJ23(6.5,-12.5) AJ24(7.5,-12.5) AJ25(8.5,-12.5) AJ26(9.5,-12.5) AJ27(10.5,-12.5) AJ28(11.5,-12.5) AJ29(12.5,-12.5) AJ30(13.5,-12.5) AJ31(14.5,-12.5) AJ32(15.5,-12.5) AK1(-15.5,-13.5) AK2(-14.5,-13.5) AK3(-13.5,-13.5) AK4(-12.5,-13.5) AK5(-11.5,-13.5) AK6(-10.5,-13.5) AK7(-9.5,-13.5) AK8(-8.5,-13.5) AK9(-7.5,-13.5) AK10(-6.5,-13.5) AK11(-5.5,-13.5) AK12(-4.5,-13.5) AK13(-3.5,-13.5) AK14(-2.5,-13.5) AK15(-1.5,-13.5) AK16(-0.5,-13.5) AK17(0.5,-13.5) AK18(1.5,-13.5) AK19(2.5,-13.5) AK20(3.5,-13.5) AK21(4.5,-13.5) AK22(5.5,-13.5) AK23(6.5,-13.5) AK24(7.5,-13.5) AK25(8.5,-13.5) AK26(9.5,-13.5) AK27(10.5,-13.5) AK28(11.5,-13.5) AK29(12.5,-13.5) AK30(13.5,-13.5) AK31(14.5,-13.5) AK32(15.5,-13.5) AL1(-15.5,-14.5) AL2(-14.5,-14.5) AL3(-13.5,-14.5) AL4(-12.5,-14.5) AL5(-11.5,-14.5) AL6(-10.5,-14.5) AL7(-9.5,-14.5) AL8(-8.5,-14.5) AL9(-7.5,-14.5) AL10(-6.5,-14.5) AL11(-5.5,-14.5) AL12(-4.5,-14.5) AL13(-3.5,-14.5) AL14(-2.5,-14.5) AL15(-1.5,-14.5) AL16(-0.5,-14.5) AL17(0.5,-14.5) AL18(1.5,-14.5) AL19(2.5,-14.5) AL20(3.5,-14.5) AL21(4.5,-14.5) AL22(5.5,-14.5) AL23(6.5,-14.5) AL24(7.5,-14.5) AL25(8.5,-14.5) AL26(9.5,-14.5) AL27(10.5,-14.5) AL28(11.5,-14.5) AL29(12.5,-14.5) AL30(13.5,-14.5) AL31(14.5,-14.5) AL32(15.5,-14.5) AM2(-14.5,-15.5) AM3(-13.5,-15.5) AM4(-12.5,-15.5) AM5(-11.5,-15.5) AM6(-10.5,-15.5) AM7(-9.5,-15.5) AM8(-8.5,-15.5) AM9(-7.5,-15.5) AM10(-6.5,-15.5) AM11(-5.5,-15.5) AM12(-4.5,-15.5) AM13(-3.5,-15.5) AM14(-2.5,-15.5) AM15(-1.5,-15.5) AM16(-0.5,-15.5) AM17(0.5,-15.5) AM18(1.5,-15.5) AM19(2.5,-15.5) AM20(3.5,-15.5) AM21(4.5,-15.5) AM22(5.5,-15.5) AM23(6.5,-15.5) AM24(7.5,-15.5) AM25(8.5,-15.5) AM26(9.5,-15.5) AM27(10.5,-15.5) AM28(11.5,-15.5) AM29(12.5,-15.5) AM30(13.5,-15.5) AM31(14.5,-15.5) B1(-15.5,14.5) B2(-14.5,14.5) B3(-13.5,14.5) B4(-12.5,14.5) B5(-11.5,14.5) B6(-10.5,14.5) B7(-9.5,14.5) B8(-8.5,14.5) B9(-7.5,14.5) B10(-6.5,14.5) B11(-5.5,14.5) B12(-4.5,14.5) B13(-3.5,14.5) B14(-2.5,14.5) B15(-1.5,14.5) B16(-0.5,14.5) B17(0.5,14.5) B18(1.5,14.5) B19(2.5,14.5) B20(3.5,14.5) B21(4.5,14.5) B22(5.5,14.5) B23(6.5,14.5) B24(7.5,14.5) B25(8.5,14.5) B26(9.5,14.5) B27(10.5,14.5) B28(11.5,14.5) B29(12.5,14.5) B30(13.5,14.5) B31(14.5,14.5) B32(15.5,14.5) C1(-15.5,13.5) C2(-14.5,13.5) C3(-13.5,13.5) C4(-12.5,13.5) C5(-11.5,13.5) C6(-10.5,13.5) C7(-9.5,13.5) C8(-8.5,13.5) C9(-7.5,13.5) C10(-6.5,13.5) C11(-5.5,13.5) C12(-4.5,13.5) C13(-3.5,13.5) C14(-2.5,13.5) C15(-1.5,13.5) C16(-0.5,13.5) C17(0.5,13.5) C18(1.5,13.5) C19(2.5,13.5) C20(3.5,13.5) C21(4.5,13.5) C22(5.5,13.5) C23(6.5,13.5) C24(7.5,13.5) C25(8.5,13.5) C26(9.5,13.5) C27(10.5,13.5) C28(11.5,13.5) C29(12.5,13.5) C30(13.5,13.5) C31(14.5,13.5) C32(15.5,13.5) D1(-15.5,12.5) D2(-14.5,12.5) D3(-13.5,12.5) D4(-12.5,12.5) D5(-11.5,12.5) D6(-10.5,12.5) D7(-9.5,12.5) D8(-8.5,12.5) D9(-7.5,12.5) D10(-6.5,12.5) D11(-5.5,12.5) D12(-4.5,12.5) D13(-3.5,12.5) D14(-2.5,12.5) D15(-1.5,12.5) D16(-0.5,12.5) D17(0.5,12.5) D18(1.5,12.5) D19(2.5,12.5) D20(3.5,12.5) D21(4.5,12.5) D22(5.5,12.5) D23(6.5,12.5) D24(7.5,12.5) D25(8.5,12.5) D26(9.5,12.5) D27(10.5,12.5) D28(11.5,12.5) D29(12.5,12.5) D30(13.5,12.5) D31(14.5,12.5) D32(15.5,12.5) E1(-15.5,11.5) E2(-14.5,11.5) E3(-13.5,11.5) E4(-12.5,11.5) E5(-11.5,11.5) E6(-10.5,11.5) E7(-9.5,11.5) E8(-8.5,11.5) E9(-7.5,11.5) E10(-6.5,11.5) E11(-5.5,11.5) E12(-4.5,11.5) E13(-3.5,11.5) E14(-2.5,11.5) E15(-1.5,11.5) E16(-0.5,11.5) E17(0.5,11.5) E18(1.5,11.5) E19(2.5,11.5) E20(3.5,11.5) E21(4.5,11.5) E22(5.5,11.5) E23(6.5,11.5) E24(7.5,11.5) E25(8.5,11.5) E26(9.5,11.5) E27(10.5,11.5) E28(11.5,11.5) E29(12.5,11.5) E30(13.5,11.5) E31(14.5,11.5) E32(15.5,11.5) F1(-15.5,10.5) F2(-14.5,10.5) F3(-13.5,10.5) F4(-12.5,10.5) F5(-11.5,10.5) F6(-10.5,10.5) F7(-9.5,10.5) F8(-8.5,10.5) F9(-7.5,10.5) F10(-6.5,10.5) F11(-5.5,10.5) F12(-4.5,10.5) F13(-3.5,10.5) F14(-2.5,10.5) F15(-1.5,10.5) F16(-0.5,10.5) F17(0.5,10.5) F18(1.5,10.5) F19(2.5,10.5) F20(3.5,10.5) F21(4.5,10.5) F22(5.5,10.5) F23(6.5,10.5) F24(7.5,10.5) F25(8.5,10.5) F26(9.5,10.5) F27(10.5,10.5) F28(11.5,10.5) F29(12.5,10.5) F30(13.5,10.5) F31(14.5,10.5) F32(15.5,10.5) G1(-15.5,9.5) G2(-14.5,9.5) G3(-13.5,9.5) G4(-12.5,9.5) G5(-11.5,9.5) G6(-10.5,9.5) G7(-9.5,9.5) G8(-8.5,9.5) G9(-7.5,9.5) G10(-6.5,9.5) G11(-5.5,9.5) G12(-4.5,9.5) G13(-3.5,9.5) G14(-2.5,9.5) G15(-1.5,9.5) G16(-0.5,9.5) G17(0.5,9.5) G18(1.5,9.5) G19(2.5,9.5) G20(3.5,9.5) G21(4.5,9.5) G22(5.5,9.5) G23(6.5,9.5) G24(7.5,9.5) G25(8.5,9.5) G26(9.5,9.5) G27(10.5,9.5) G28(11.5,9.5) G29(12.5,9.5) G30(13.5,9.5) G31(14.5,9.5) G32(15.5,9.5) H1(-15.5,8.5) H2(-14.5,8.5) H3(-13.5,8.5) H4(-12.5,8.5) H5(-11.5,8.5) H6(-10.5,8.5) H7(-9.5,8.5) H8(-8.5,8.5) H9(-7.5,8.5) H10(-6.5,8.5) H11(-5.5,8.5) H12(-4.5,8.5) H13(-3.5,8.5) H14(-2.5,8.5) H15(-1.5,8.5) H16(-0.5,8.5) H17(0.5,8.5) H18(1.5,8.5) H19(2.5,8.5) H20(3.5,8.5) H21(4.5,8.5) H22(5.5,8.5) H23(6.5,8.5) H24(7.5,8.5) H25(8.5,8.5) H26(9.5,8.5) H27(10.5,8.5) H28(11.5,8.5) H29(12.5,8.5) H30(13.5,8.5) H31(14.5,8.5) H32(15.5,8.5) J1(-15.5,7.5) J2(-14.5,7.5) J3(-13.5,7.5) J4(-12.5,7.5) J5(-11.5,7.5) J6(-10.5,7.5) J7(-9.5,7.5) J8(-8.5,7.5) J9(-7.5,7.5) J10(-6.5,7.5) J11(-5.5,7.5) J12(-4.5,7.5) J13(-3.5,7.5) J14(-2.5,7.5) J15(-1.5,7.5) J16(-0.5,7.5) J17(0.5,7.5) J18(1.5,7.5) J19(2.5,7.5) J20(3.5,7.5) J21(4.5,7.5) J22(5.5,7.5) J23(6.5,7.5) J24(7.5,7.5) J25(8.5,7.5) J26(9.5,7.5) J27(10.5,7.5) J28(11.5,7.5) J29(12.5,7.5) J30(13.5,7.5) J31(14.5,7.5) J32(15.5,7.5) K1(-15.5,6.5) K2(-14.5,6.5) K3(-13.5,6.5) K4(-12.5,6.5) K5(-11.5,6.5) K6(-10.5,6.5) K7(-9.5,6.5) K8(-8.5,6.5) K9(-7.5,6.5) K10(-6.5,6.5) K11(-5.5,6.5) K12(-4.5,6.5) K13(-3.5,6.5) K14(-2.5,6.5) K15(-1.5,6.5) K16(-0.5,6.5) K17(0.5,6.5) K18(1.5,6.5) K19(2.5,6.5) K20(3.5,6.5) K21(4.5,6.5) K22(5.5,6.5) K23(6.5,6.5) K24(7.5,6.5) K25(8.5,6.5) K26(9.5,6.5) K27(10.5,6.5) K28(11.5,6.5) K29(12.5,6.5) K30(13.5,6.5) K31(14.5,6.5) K32(15.5,6.5) L1(-15.5,5.5) L2(-14.5,5.5) L3(-13.5,5.5) L4(-12.5,5.5) L5(-11.5,5.5) L6(-10.5,5.5) L7(-9.5,5.5) L8(-8.5,5.5) L9(-7.5,5.5) L10(-6.5,5.5) L11(-5.5,5.5) L12(-4.5,5.5) L13(-3.5,5.5) L14(-2.5,5.5) L15(-1.5,5.5) L16(-0.5,5.5) L17(0.5,5.5) L18(1.5,5.5) L19(2.5,5.5) L20(3.5,5.5) L21(4.5,5.5) L22(5.5,5.5) L23(6.5,5.5) L24(7.5,5.5) L25(8.5,5.5) L26(9.5,5.5) L27(10.5,5.5) L28(11.5,5.5) L29(12.5,5.5) L30(13.5,5.5) L31(14.5,5.5) L32(15.5,5.5) M1(-15.5,4.5) M2(-14.5,4.5) M3(-13.5,4.5) M4(-12.5,4.5) M5(-11.5,4.5) M6(-10.5,4.5) M7(-9.5,4.5) M8(-8.5,4.5) M9(-7.5,4.5) M10(-6.5,4.5) M11(-5.5,4.5) M12(-4.5,4.5) M13(-3.5,4.5) M14(-2.5,4.5) M15(-1.5,4.5) M16(-0.5,4.5) M17(0.5,4.5) M18(1.5,4.5) M19(2.5,4.5) M20(3.5,4.5) M21(4.5,4.5) M22(5.5,4.5) M23(6.5,4.5) M24(7.5,4.5) M25(8.5,4.5) M26(9.5,4.5) M27(10.5,4.5) M28(11.5,4.5) M29(12.5,4.5) M30(13.5,4.5) M31(14.5,4.5) M32(15.5,4.5) N1(-15.5,3.5) N2(-14.5,3.5) N3(-13.5,3.5) N4(-12.5,3.5) N5(-11.5,3.5) N6(-10.5,3.5) N7(-9.5,3.5) N8(-8.5,3.5) N9(-7.5,3.5) N10(-6.5,3.5) N11(-5.5,3.5) N12(-4.5,3.5) N13(-3.5,3.5) N14(-2.5,3.5) N15(-1.5,3.5) N16(-0.5,3.5) N17(0.5,3.5) N18(1.5,3.5) N19(2.5,3.5) N20(3.5,3.5) N21(4.5,3.5) N22(5.5,3.5) N23(6.5,3.5) N24(7.5,3.5) N25(8.5,3.5) N26(9.5,3.5) N27(10.5,3.5) N28(11.5,3.5) N29(12.5,3.5) N30(13.5,3.5) N31(14.5,3.5) N32(15.5,3.5) P1(-15.5,2.5) P2(-14.5,2.5) P3(-13.5,2.5) P4(-12.5,2.5) P5(-11.5,2.5) P6(-10.5,2.5) P7(-9.5,2.5) P8(-8.5,2.5) P9(-7.5,2.5) P10(-6.5,2.5) P11(-5.5,2.5) P12(-4.5,2.5) P13(-3.5,2.5) P14(-2.5,2.5) P15(-1.5,2.5) P16(-0.5,2.5) P17(0.5,2.5) P18(1.5,2.5) P19(2.5,2.5) P20(3.5,2.5) P21(4.5,2.5) P22(5.5,2.5) P23(6.5,2.5) P24(7.5,2.5) P25(8.5,2.5) P26(9.5,2.5) P27(10.5,2.5) P28(11.5,2.5) P29(12.5,2.5) P30(13.5,2.5) P31(14.5,2.5) P32(15.5,2.5) R1(-15.5,1.5) R2(-14.5,1.5) R3(-13.5,1.5) R4(-12.5,1.5) R5(-11.5,1.5) R6(-10.5,1.5) R7(-9.5,1.5) R8(-8.5,1.5) R9(-7.5,1.5) R10(-6.5,1.5) R11(-5.5,1.5) R12(-4.5,1.5) R13(-3.5,1.5) R14(-2.5,1.5) R15(-1.5,1.5) R16(-0.5,1.5) R17(0.5,1.5) R18(1.5,1.5) R19(2.5,1.5) R20(3.5,1.5) R21(4.5,1.5) R22(5.5,1.5) R23(6.5,1.5) R24(7.5,1.5) R25(8.5,1.5) R26(9.5,1.5) R27(10.5,1.5) R28(11.5,1.5) R29(12.5,1.5) R30(13.5,1.5) R31(14.5,1.5) R32(15.5,1.5) T1(-15.5,0.5) T2(-14.5,0.5) T3(-13.5,0.5) T4(-12.5,0.5) T5(-11.5,0.5) T6(-10.5,0.5) T7(-9.5,0.5) T8(-8.5,0.5) T9(-7.5,0.5) T10(-6.5,0.5) T11(-5.5,0.5) T12(-4.5,0.5) T13(-3.5,0.5) T14(-2.5,0.5) T15(-1.5,0.5) T16(-0.5,0.5) T17(0.5,0.5) T18(1.5,0.5) T19(2.5,0.5) T20(3.5,0.5) T21(4.5,0.5) T22(5.5,0.5) T23(6.5,0.5) T24(7.5,0.5) T25(8.5,0.5) T26(9.5,0.5) T27(10.5,0.5) T28(11.5,0.5) T29(12.5,0.5) T30(13.5,0.5) T31(14.5,0.5) T32(15.5,0.5) U1(-15.5,-0.5) U2(-14.5,-0.5) U3(-13.5,-0.5) U4(-12.5,-0.5) U5(-11.5,-0.5) U6(-10.5,-0.5) U7(-9.5,-0.5) U8(-8.5,-0.5) U9(-7.5,-0.5) U10(-6.5,-0.5) U11(-5.5,-0.5) U12(-4.5,-0.5) U13(-3.5,-0.5) U14(-2.5,-0.5) U15(-1.5,-0.5) U16(-0.5,-0.5) U17(0.5,-0.5) U18(1.5,-0.5) U19(2.5,-0.5) U20(3.5,-0.5) U21(4.5,-0.5) U22(5.5,-0.5) U23(6.5,-0.5) U24(7.5,-0.5) U25(8.5,-0.5) U26(9.5,-0.5) U27(10.5,-0.5) U28(11.5,-0.5) U29(12.5,-0.5) U30(13.5,-0.5) U31(14.5,-0.5) U32(15.5,-0.5) V1(-15.5,-1.5) V2(-14.5,-1.5) V3(-13.5,-1.5) V4(-12.5,-1.5) V5(-11.5,-1.5) V6(-10.5,-1.5) V7(-9.5,-1.5) V8(-8.5,-1.5) V9(-7.5,-1.5) V10(-6.5,-1.5) V11(-5.5,-1.5) V12(-4.5,-1.5) V13(-3.5,-1.5) V14(-2.5,-1.5) V15(-1.5,-1.5) V16(-0.5,-1.5) V17(0.5,-1.5) V18(1.5,-1.5) V19(2.5,-1.5) V20(3.5,-1.5) V21(4.5,-1.5) V22(5.5,-1.5) V23(6.5,-1.5) V24(7.5,-1.5) V25(8.5,-1.5) V26(9.5,-1.5) V27(10.5,-1.5) V28(11.5,-1.5) V29(12.5,-1.5) V30(13.5,-1.5) V31(14.5,-1.5) V32(15.5,-1.5) W1(-15.5,-2.5) W2(-14.5,-2.5) W3(-13.5,-2.5) W4(-12.5,-2.5) W5(-11.5,-2.5) W6(-10.5,-2.5) W7(-9.5,-2.5) W8(-8.5,-2.5) W9(-7.5,-2.5) W10(-6.5,-2.5) W11(-5.5,-2.5) W12(-4.5,-2.5) W13(-3.5,-2.5) W14(-2.5,-2.5) W15(-1.5,-2.5) W16(-0.5,-2.5) W17(0.5,-2.5) W18(1.5,-2.5) W19(2.5,-2.5) W20(3.5,-2.5) W21(4.5,-2.5) W22(5.5,-2.5) W23(6.5,-2.5) W24(7.5,-2.5) W25(8.5,-2.5) W26(9.5,-2.5) W27(10.5,-2.5) W28(11.5,-2.5) W29(12.5,-2.5) W30(13.5,-2.5) W31(14.5,-2.5) W32(15.5,-2.5) Y1(-15.5,-3.5) Y2(-14.5,-3.5) Y3(-13.5,-3.5) Y4(-12.5,-3.5) Y5(-11.5,-3.5) Y6(-10.5,-3.5) Y7(-9.5,-3.5) Y8(-8.5,-3.5) Y9(-7.5,-3.5) Y10(-6.5,-3.5) Y11(-5.5,-3.5) Y12(-4.5,-3.5) Y13(-3.5,-3.5) Y14(-2.5,-3.5) Y15(-1.5,-3.5) Y16(-0.5,-3.5) Y17(0.5,-3.5) Y18(1.5,-3.5) Y19(2.5,-3.5) Y20(3.5,-3.5) Y21(4.5,-3.5) Y22(5.5,-3.5) Y23(6.5,-3.5) Y24(7.5,-3.5) Y25(8.5,-3.5) Y26(9.5,-3.5) Y27(10.5,-3.5) Y28(11.5,-3.5) Y29(12.5,-3.5) Y30(13.5,-3.5) Y31(14.5,-3.5) Y32(15.5,-3.5)
  silkscreen extent -17.27,-16.5 16.5,16.5, body extent -16.5,-16.5 16.5,16.5, height 3.5
HC49/4H_SMX [mm] "Surface Mount Quartz Crystal; Body 13.4 (inc. leads) x 4.9 mm (LxW max)"
  rect 5.5x2 smd: 1(-4.75,0) 2(4.75,0)
  silkscreen extent -5.7,-2.45 5.7,2.45
HDR1X4 [mm] "Connector; Header; 4 Position"
  rect 1.5x1.5 hole 0.9: 1(0,0)
  round 1.5 hole 0.9: 2(2.54,0) 3(5.08,0) 4(7.62,0)
  silkscreen extent -1.27,-1.27 8.89,1.27
HDR2X5 [mm] "Connector; Header; 5x2 Position"
  rect 1.5x1.5 hole 0.9: 1(0,0)
  round 1.5 hole 0.9: 2(0,2.54) 3(2.54,0) 4(2.54,2.54) 5(5.08,0) 6(5.08,2.54) 7(7.62,0) 8(7.62,2.54) 9(10.16,0) 10(10.16,2.54)
  silkscreen extent -1.27,-1.27 11.43,3.81
IHLP4040DZER1R5M01 [mm] "1.5 uH SMD Inductor"
  rrect5% 3.5x4 smd: 1(-4.75,0) 2(4.75,0)
  silkscreen extent -5.8,-5.1 5.8,5.1
INDC3225X22N [mm] "Chip Inductor, 2-Leads, Body 3,2x2,5mm, IPC Medium Density"
  rect 1.05x2.6 smd: 1(-1.575,0) 2(1.575,0)
  silkscreen extent -0.65,-1.2 0.65,1.2, body extent -1.6,-1.25 1.6,1.25, height 2.2
"Mini USB B" [mm]
  rect 2.25x0.5 smd: 1(2.15,-1.6) 2(2.15,-0.8) 3(2.15,0) 4(2.15,0.8) 5(2.15,1.6)
  rect 4x2.05 smd: 6(-2.125,4.825) 8(-2.125,-4.825)
  rect 3.5x2.05 smd: 7(2.125,4.825) 9(2.125,-4.825)
"MOLEX 8981" [mil] "Molex 8981 power connector"
  round 110 hole 70.08: 1(-300,0) 2(-100,0) 3(100,0) 4(300,0)
  silkscreen extent -457,-161 457,161
MUB10A_N [mm] "TSSOP, 10-Leads, Body 3x3mm, Pitch 0.5mm, IPC Medium Density"
  oval 1.7x0.3 smd: 1(-2.05,1) 2(-2.05,0.5) 3(-2.05,0) 4(-2.05,-0.5) 5(-2.05,-1) 6(2.05,-1) 7(2.05,-0.5) 8(2.05,0) 9(2.05,0.5) 10(2.05,1)
  silkscreen extent -2.17,-1.6 0.8,1.82, body extent -1.6,-1.6 1.6,1.6, height 1.09
"Probe pad" [mm]
  rect 1x1 smd: 1(0,0)
"PROBE PAD" [mm]
  rect 1x1 smd: 1(0,0)
RESC1608L [mm] "Chip Resistor, Body 1.6x0.8mm, IPC High Density"
  rect 0.7x0.9 smd: 1(-0.75,0) 2(0.75,0)
  silkscreen extent -0.2,-0.35 0.2,0.35, body extent -0.85,-0.48 0.85,0.48, height 0.9
RJ45 [mm]
  round 1.5 hole 0.889: 1(-4.445,-1.27) 2(-3.175,1.27) 3(-1.905,-1.27) 4(-0.635,1.27) 5(0.635,-1.27) 6(1.905,1.27) 7(3.175,-1.27) 8(4.445,1.27)
  oval 2.559x2.54 hole 1.57: 9(-7.75,-4.57)
  round 2.54 hole 1.57: 10(7.75,-4.57)
  round 0 hole 3.2 unplated: c(-5.72,-7.62) d(5.72,-7.62)
"SMD Button" [mm] "SMD Button from Farnell"
  rect 1.4x2.1 smd: 1(2.23,4.55) 2(2.23,-4.55) 3(-2.23,4.55) 4(-2.23,-4.55)
  silkscreen extent -2.51,-2.51 2.51,2.5
"SMD Crystal 7x5 mm" [mm] "SMD Crystal from TXC"
  rect 1.8x2 smd: 1(-2.54,-2.1) 2(2.54,-2.1) 3(2.54,2.1) 4(-2.54,2.1)
SO-8C_M [mm] "SOIC, 8-Leads, Body 4.9x3.9mm, Pitch 1.27mm, IPC Low Density"
  oval 2.5x0.7 smd: 1(-2.45,1.905) 2(-2.45,0.635) 3(-2.45,-0.635) 4(-2.45,-1.905) 5(2.45,-1.905) 6(2.45,-0.635) 7(2.45,0.635) 8(2.45,1.905)
  silkscreen extent -2.58,-2.5 0.8,2.93, body extent -2,-2.5 2,2.5, height 1.75
SOT407-1_N [mm] "Thin QFP, 100-Leads, Body 14x14mm, Pitch 0.5mm, IPC Medium Density"
  oval 1.8x0.3 smd: 1(-7.55,6) 2(-7.55,5.5) 3(-7.55,5) 4(-7.55,4.5) 5(-7.55,4) 6(-7.55,3.5) 7(-7.55,3) 8(-7.55,2.5) 9(-7.55,2) 10(-7.55,1.5) 11(-7.55,1) 12(-7.55,0.5) 13(-7.55,0) 14(-7.55,-0.5) 15(-7.55,-1) 16(-7.55,-1.5) 17(-7.55,-2) 18(-7.55,-2.5) 19(-7.55,-3) 20(-7.55,-3.5) 21(-7.55,-4) 22(-7.55,-4.5) 23(-7.55,-5) 24(-7.55,-5.5) 25(-7.55,-6) 51(7.55,-6) 52(7.55,-5.5) 53(7.55,-5) 54(7.55,-4.5) 55(7.55,-4) 56(7.55,-3.5) 57(7.55,-3) 58(7.55,-2.5) 59(7.55,-2) 60(7.55,-1.5) 61(7.55,-1) 62(7.55,-0.5) 63(7.55,0) 64(7.55,0.5) 65(7.55,1) 66(7.55,1.5) 67(7.55,2) 68(7.55,2.5) 69(7.55,3) 70(7.55,3.5) 71(7.55,4) 72(7.55,4.5) 73(7.55,5) 74(7.55,5.5) 75(7.55,6)
  oval 0.3x1.8 smd: 26(-6,-7.55) 27(-5.5,-7.55) 28(-5,-7.55) 29(-4.5,-7.55) 30(-4,-7.55) 31(-3.5,-7.55) 32(-3,-7.55) 33(-2.5,-7.55) 34(-2,-7.55) 35(-1.5,-7.55) 36(-1,-7.55) 37(-0.5,-7.55) 38(0,-7.55) 39(0.5,-7.55) 40(1,-7.55) 41(1.5,-7.55) 42(2,-7.55) 43(2.5,-7.55) 44(3,-7.55) 45(3.5,-7.55) 46(4,-7.55) 47(4.5,-7.55) 48(5,-7.55) 49(5.5,-7.55) 50(6,-7.55) 76(6,7.55) 77(5.5,7.55) 78(5,7.55) 79(4.5,7.55) 80(4,7.55) 81(3.5,7.55) 82(3,7.55) 83(2.5,7.55) 84(2,7.55) 85(1.5,7.55) 86(1,7.55) 87(0.5,7.55) 88(0,7.55) 89(-0.5,7.55) 90(-1,7.55) 91(-1.5,7.55) 92(-2,7.55) 93(-2.5,7.55) 94(-3,7.55) 95(-3.5,7.55) 96(-4,7.55) 97(-4.5,7.55) 98(-5,7.55) 99(-5.5,7.55) 100(-6,7.55)
  silkscreen extent -7.67,-6.25 6.25,6.82, body extent -7,-7 7,7, height 1.6
TS3B_N [mm] "D2-PAK, 4-Leads, Body 8.6x10.2mm, Pitch 2.54mm, Lead Span 14.2mm, IPC Medium Density"
  rect 3.3x1.05 smd: 1(-6.05,2.54) 2(-6.05,0) 3(-6.05,-2.54)
  rect 8.4x10.5 smd: 4(3.5,0)
  silkscreen extent -6.17,-5.2 -1.1,5.2, body extent -2.6,-5.2 6.29,5.2, height 4.64
VBH48A_N [mm] "Thin QFP, 48-Leads, Body 7x7mm, Pitch 0.5mm, IPC Medium Density"
  oval 1.8x0.3 smd: 1(-4.05,2.75) 2(-4.05,2.25) 3(-4.05,1.75) 4(-4.05,1.25) 5(-4.05,0.75) 6(-4.05,0.25) 7(-4.05,-0.25) 8(-4.05,-0.75) 9(-4.05,-1.25) 10(-4.05,-1.75) 11(-4.05,-2.25) 12(-4.05,-2.75) 25(4.05,-2.75) 26(4.05,-2.25) 27(4.05,-1.75) 28(4.05,-1.25) 29(4.05,-0.75) 30(4.05,-0.25) 31(4.05,0.25) 32(4.05,0.75) 33(4.05,1.25) 34(4.05,1.75) 35(4.05,2.25) 36(4.05,2.75)
  oval 0.3x1.8 smd: 13(-2.75,-4.05) 14(-2.25,-4.05) 15(-1.75,-4.05) 16(-1.25,-4.05) 17(-0.75,-4.05) 18(-0.25,-4.05) 19(0.25,-4.05) 20(0.75,-4.05) 21(1.25,-4.05) 22(1.75,-4.05) 23(2.25,-4.05) 24(2.75,-4.05) 37(2.75,4.05) 38(2.25,4.05) 39(1.75,4.05) 40(1.25,4.05) 41(0.75,4.05) 42(0.25,4.05) 43(-0.25,4.05) 44(-0.75,4.05) 45(-1.25,4.05) 46(-1.75,4.05) 47(-2.25,4.05) 48(-2.75,4.05)
  silkscreen extent -4.17,-2.75 2.75,3.57, body extent -3.5,-3.5 3.5,3.5, height 1.6

## Part data
A_C6 A_C7 A_C8 A_C9 A_C10 A_C11 A_C12 C3 C4 C6 C7 C8 C9 C10 C18 C19 C20 C21 C22 C23 C24 C26 C27 C28 C33 C34 C41 C42 C43 F_C29 F_C30 F_C31 F_C32 F_C51 F_C52 F_C53 F_C54: "Capacitor (Semiconductor SIM Model)"
ARM: "ARM7 16/32-Bit Microcontroller, 128KB Flash, 34KB RAM, 4 Channel CAN, 100-Lead LQFP"
C1: library part "Cap Semi", "Capacitor (Semiconductor SIM Model)"
C2 C5 C11 F_60 F_C13 F_C14 F_C15 F_C16 F_C17 F_C18 F_C19 F_C20 F_C21 F_C22 F_C55 F_C56 F_C58 F_C59 F_C61 F_C62 F_C63 F_C64 F_C65: library part "Cap Pol3", "Polarized Capacitor (Surface Mount)"
C12 C13 C25: "Solid Tantalum Chip Capacitor, T492 Series - CWR11 Style Per Mil-PRF-55365/8"
ETHERNET: "PHYTER® Commercial Temperature Single Port 10/100 Mb/s Ethernet Physical Layer Transceiver"
F_C1 F_C2 F_C3 F_C4 F_C5 F_C6 F_C7 F_C8 F_C9 F_C10 F_C11 F_C12 F_C23 F_C24 F_C25 F_C26 F_C27 F_C28: "Array of 4x47nF"
FPGA FPGA1: "Stratix II 1.2V FPGA, 758 I/Os, 1020-Pin FineLine BGA, Speed Grade 4, Commercial Grade, Pb-Free"
H1 H2: "Header, 5-Pin, Dual row"
H4 H5 H6: "Header, 4-Pin"
R1 R2 R3 R4 R5 R6 R7 R8 R10 R12 R13 R14 R15 R16 R17 R18 R19 R20 R21 R22 R23 R24 R26 R44 R45 R46 R49 R51: "Resistor"
R33 R36 R37 R38 R39 R40 R41 R42 R43 R50 R52 R53 R54 R55 R56: library part Res3, "Resistor"
SW: "High-Performance Synchronous Buck Controller with Comprehensive Fault Protection Features"
U1: "1.5A Low Dropout Positive Regulators"

## Via types
v1: diameter 20, hole 13, Top Layer to Bottom Layer, tented both sides, 907 vias
v2: diameter 20, hole 13, Top Layer to Bottom Layer, 189 vias
v3: diameter 30, hole 20, Top Layer to Bottom Layer, 14 vias
v4: diameter 40, hole 30, Top Layer to Bottom Layer, 12 vias
v5: diameter 50, hole 40, Top Layer to Bottom Layer, 5 vias
v6: diameter 25, hole 20, Top Layer to Bottom Layer, 1 vias

## Nets (pads, with @x,y where several pads share a name; then routed paths per layer and width w, separated by ;. In a path a pad name is that pad's centre, name@x,y a point inside that pad or via, vN(x,y) a via of type N, cw(c..) or ccw(c..) an arc to the next point about the centre after c; other vN are vias at no path point)
AN0: ETHERNET.28 R15.1 | length 205.5
  Top Layer w6: ETHERNET.28@4899.45,6158.79 5042.54,6158.79 5066.75,6183 5093.5,6183 R15.1@5094.5,6182
AN1: ETHERNET.27 R14.1 | length 114.5
  Top Layer w6: ETHERNET.27@4899.45,6139.1 4987.4,6139.1 R14.1@5006,6120.5 ; R14.1@5005.75,6127.52 R14.1@5005.91,6127.36
AN_EN: ETHERNET.26 R16.1 R17.2 | length 196.1
  Top Layer w6: ETHERNET.26@4899.45,6119.42 4931.58,6119.42 4943,6108 ; 4942.39,6107.39 5005,6044.79 5005,5993 R17.2@5008,5990 ; R17.2@5009.72,5993.9 R17.2@5012.05,5991.57